# Allegro board alinx_acau15_carrier_21.brd
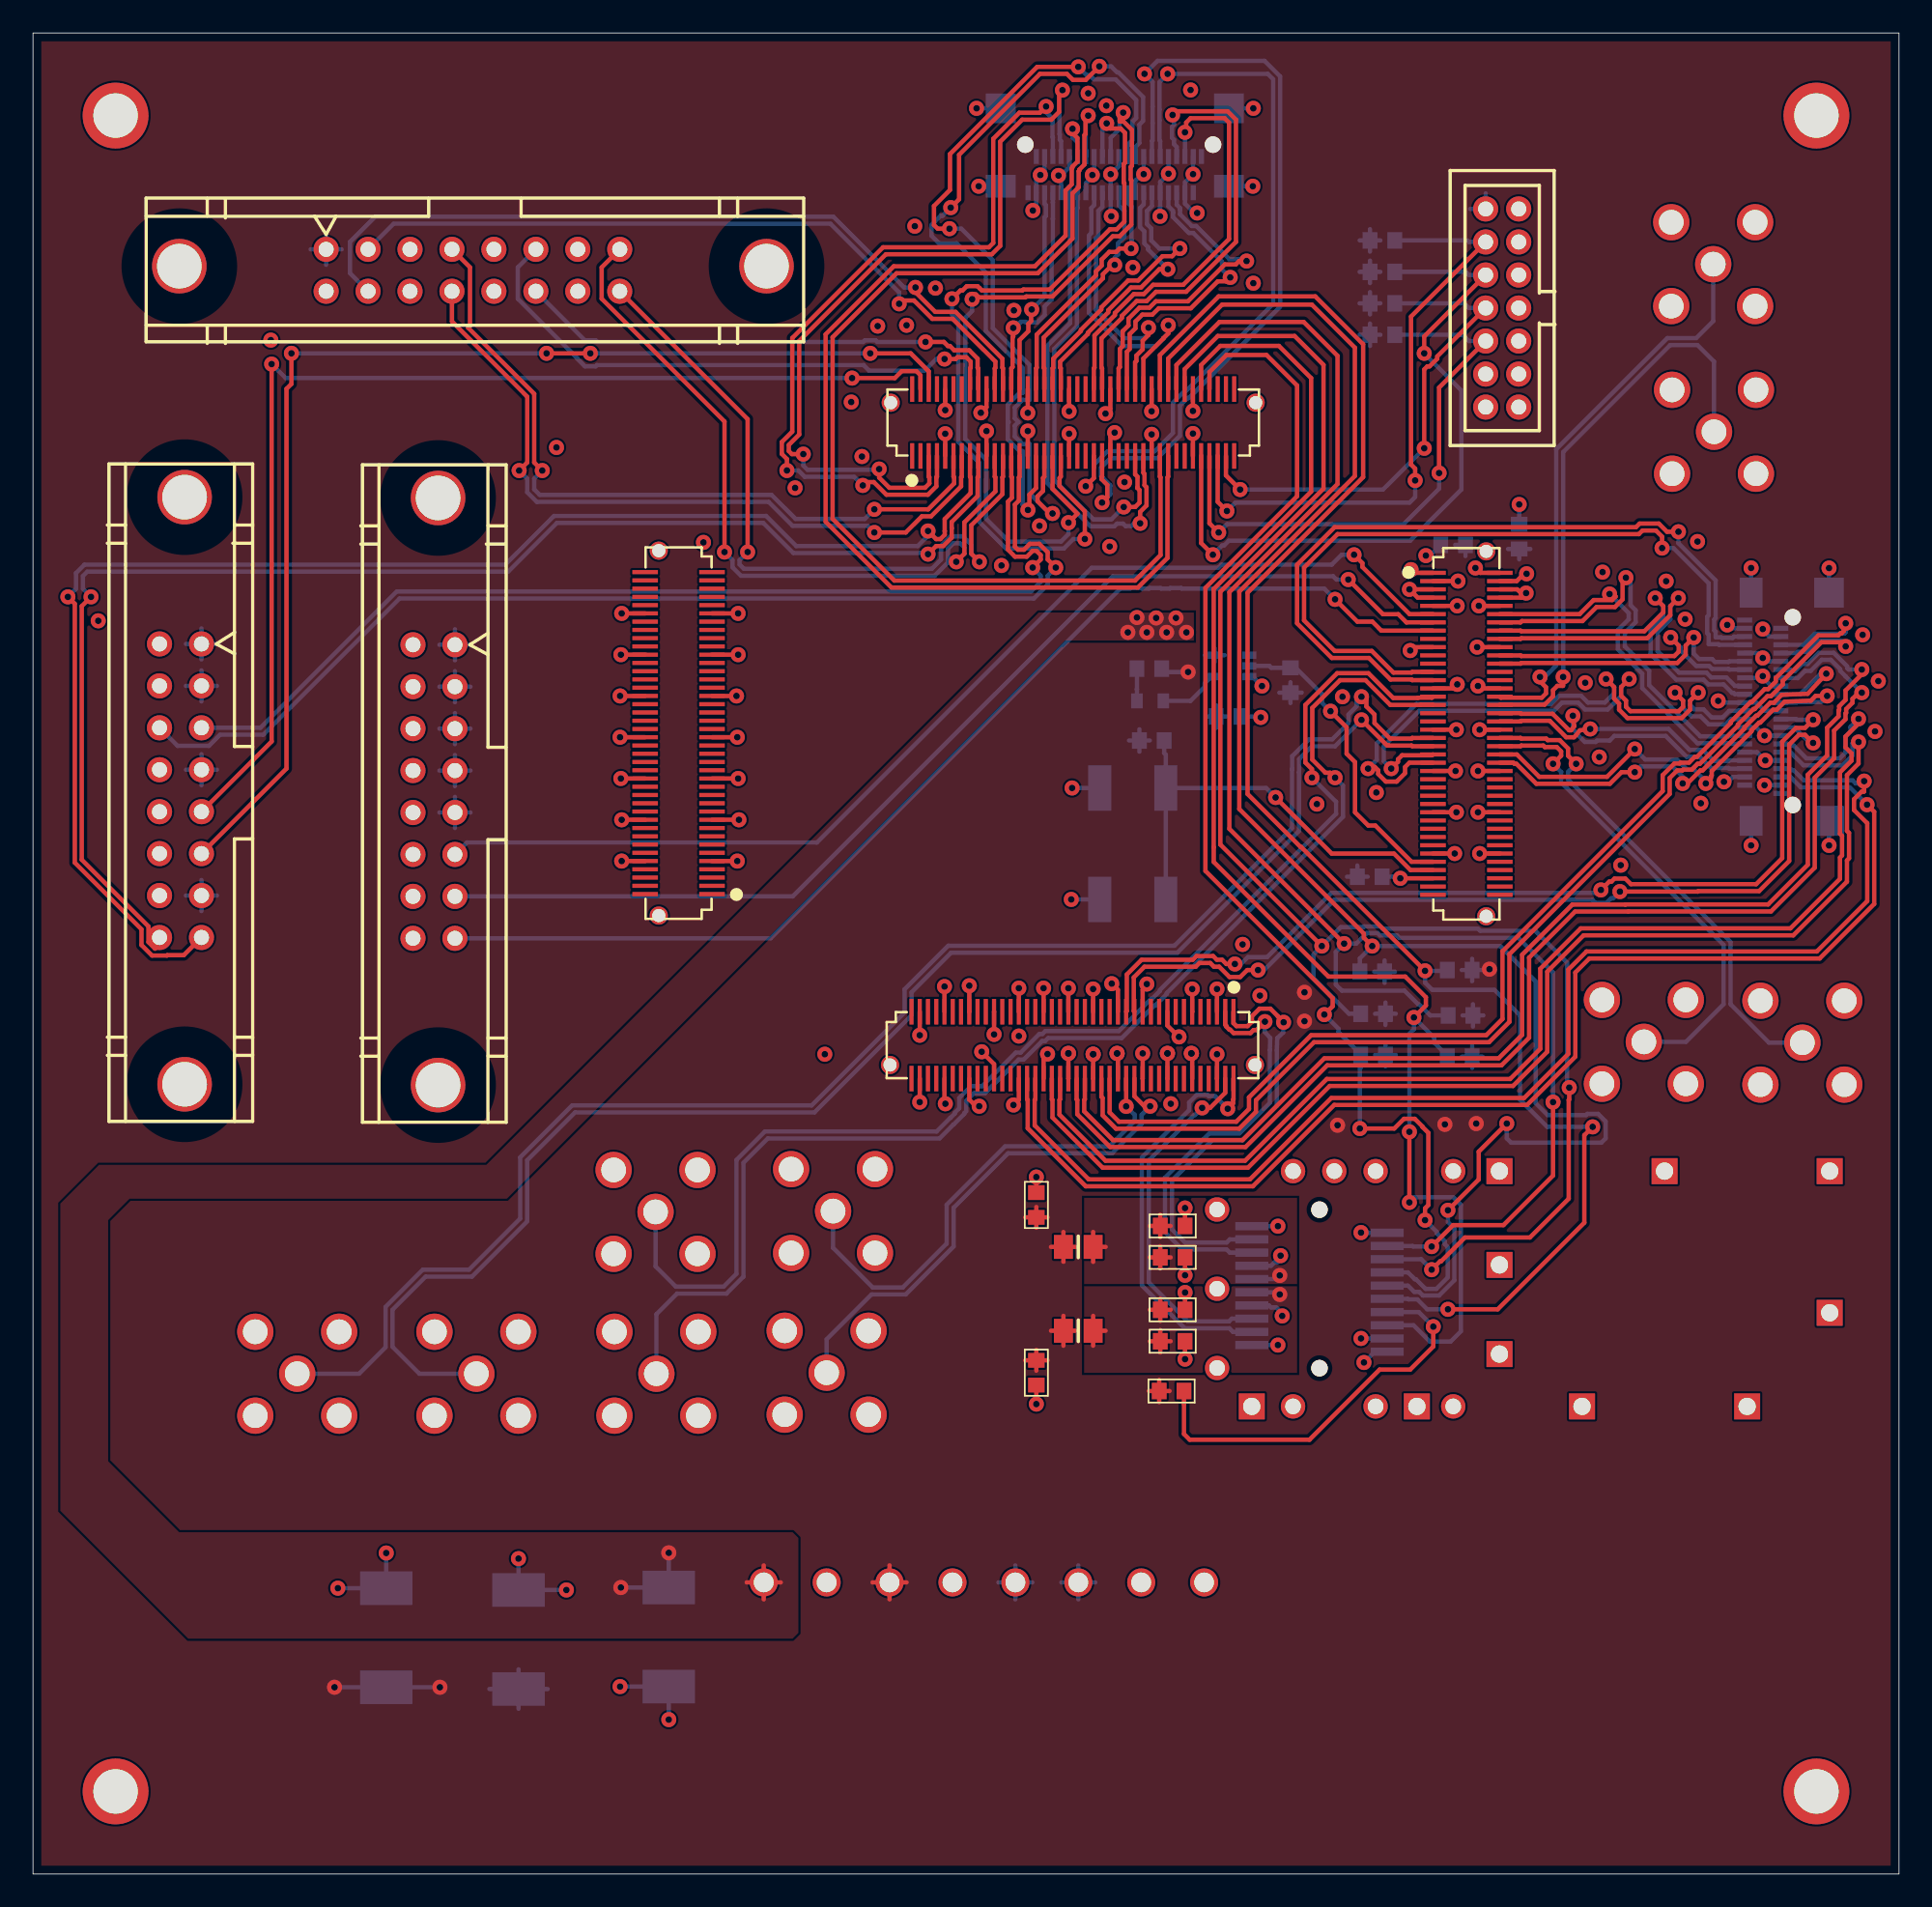
[diagram p0: board, top side]
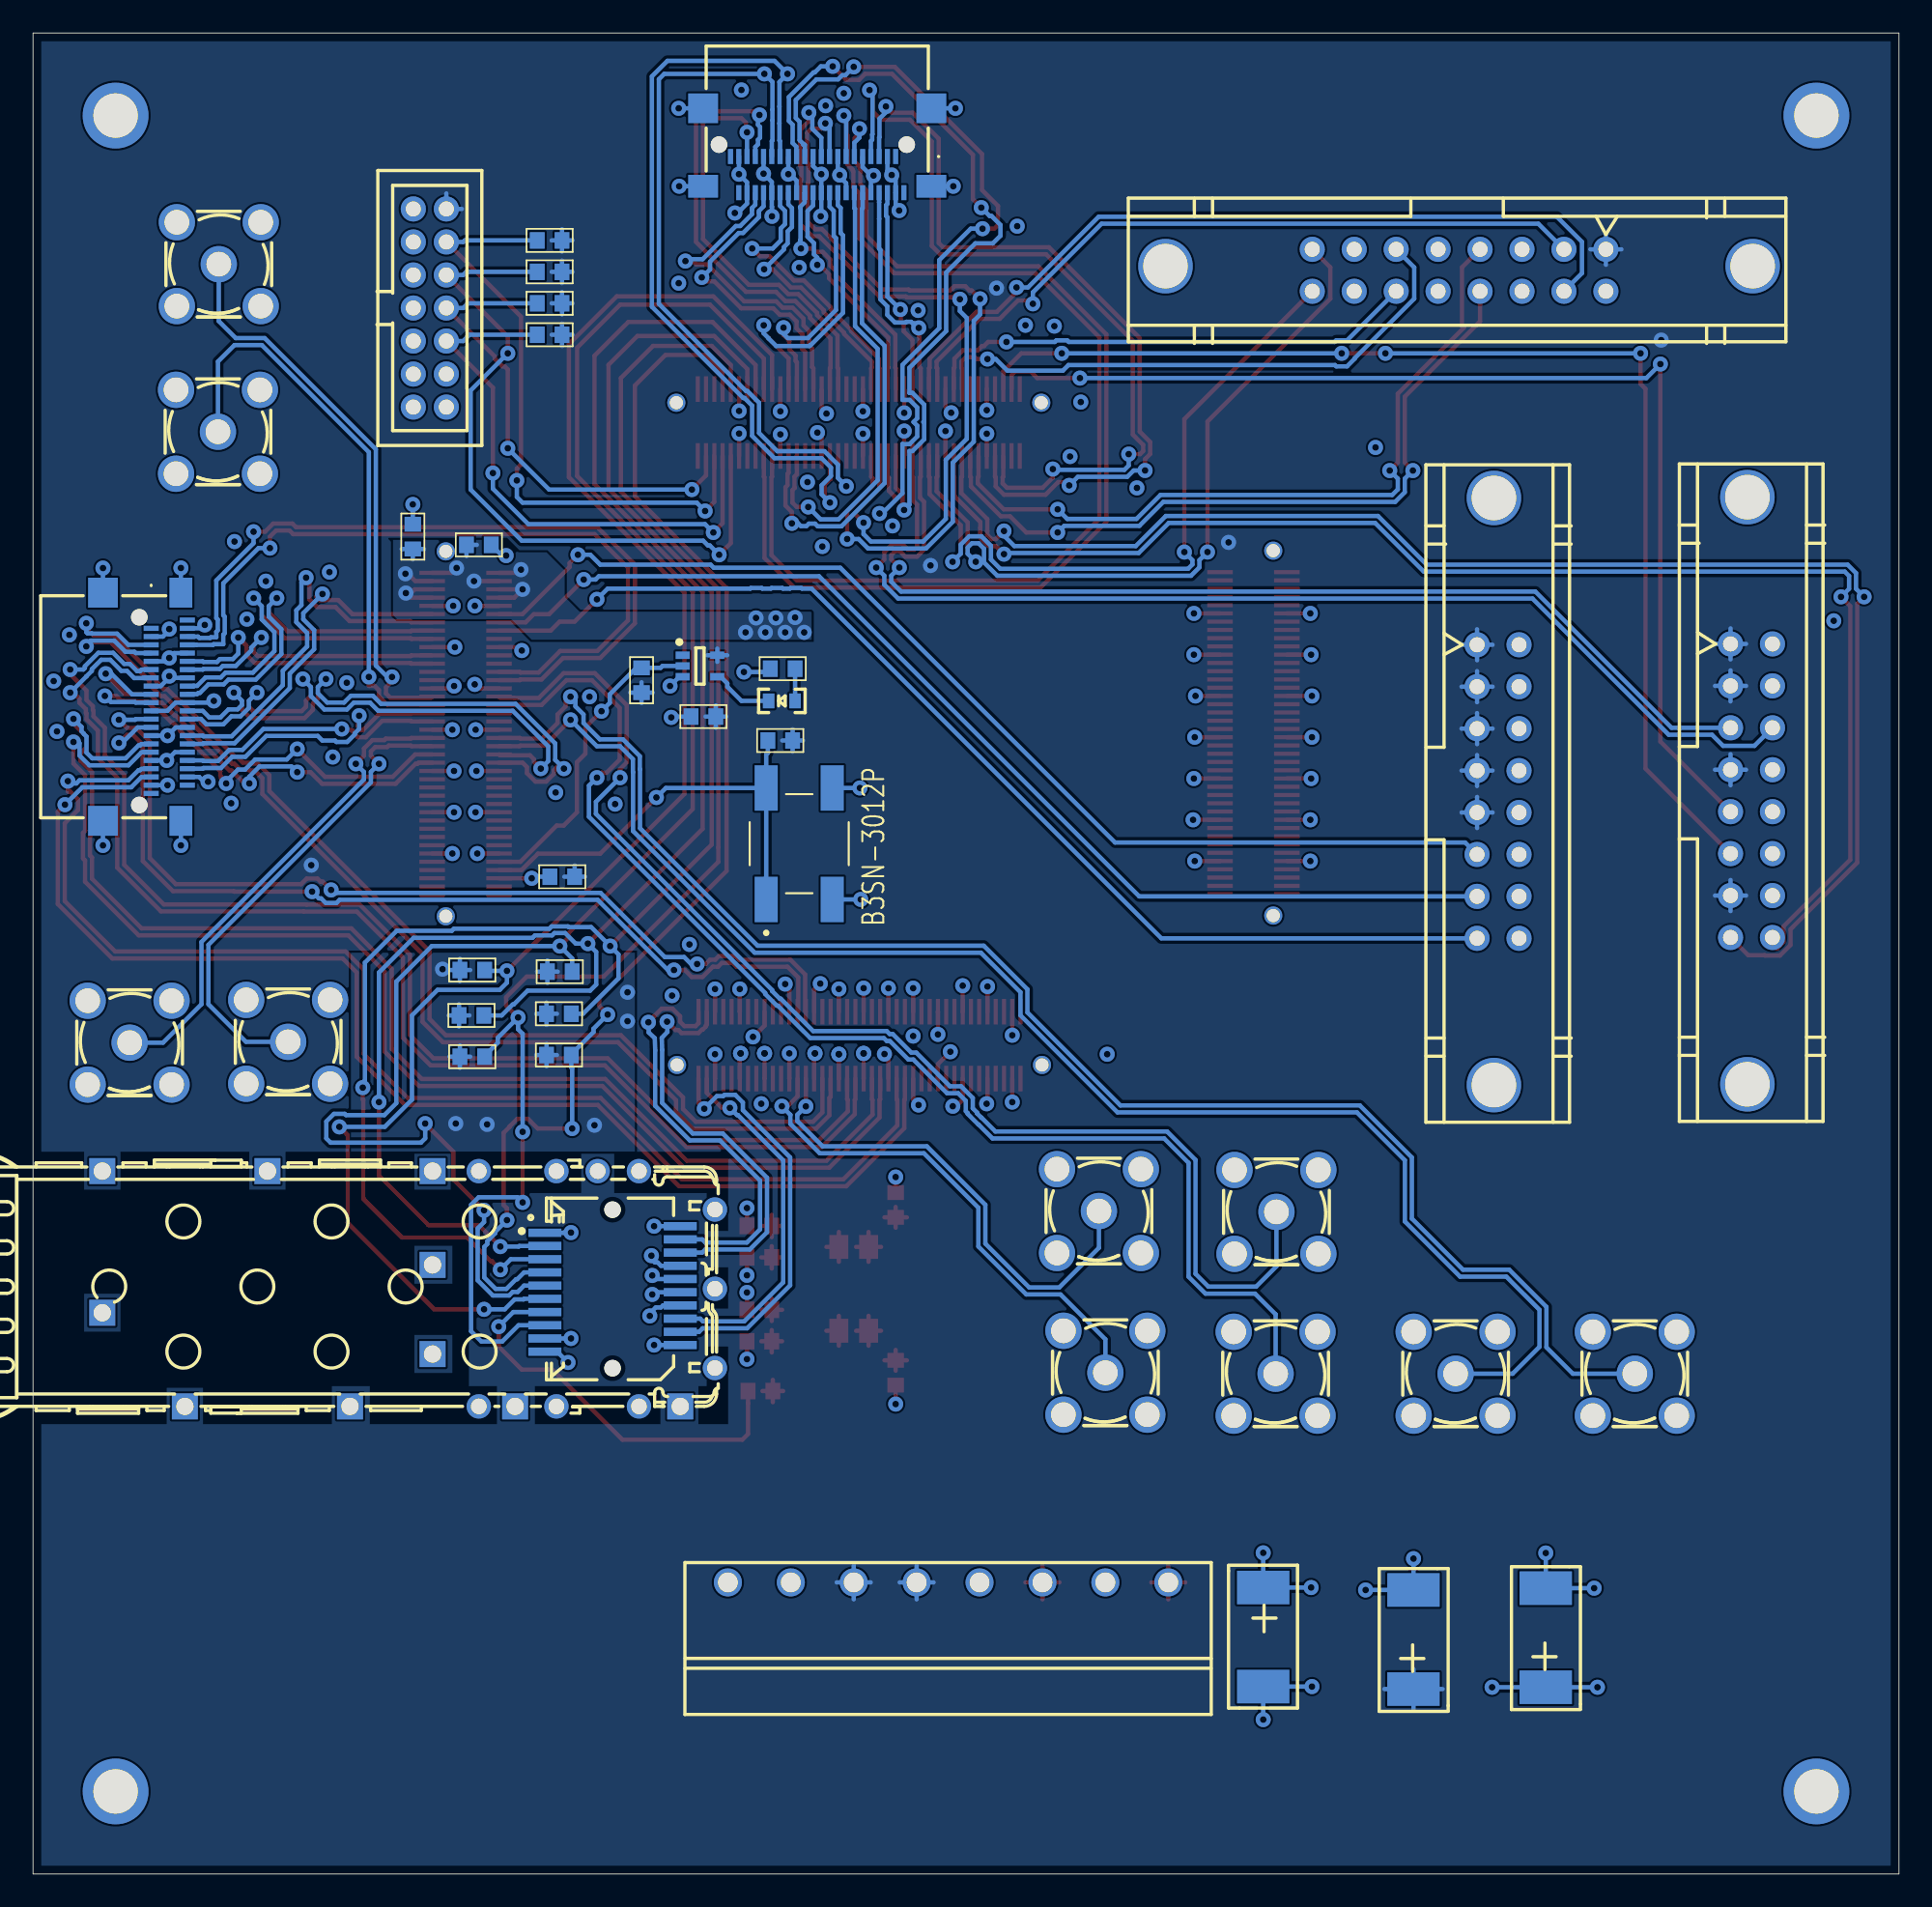
[diagram p1: board, bottom side, seen from below]

Outline 113 x 111.5 mm; copper layers: TOP, L2, L3, BOTTOM. Coordinates in mm from the lower left corner of the outline.
Outline path: 0,111.5 113,111.5 113,0 0,0 0,111.5

## Design rules (mm)
constraint set DEFAULT: min track width 0.262, pair gap 0.16
net group 224_RX<1>: nets 224_RX_N<1> 224_RX_P<1>
net group 224_RX<2>: nets 224_RX_N<2> 224_RX_P<2>
net group 224_RX<3>: nets 224_RX_N<3> 224_RX_P<3>
net group 224_TX<1>: nets 224_TX_N<1> 224_TX_P<1>
net group 224_TX<2>: nets 224_TX_N<2> 224_TX_P<2>
net group 224_TX<3>: nets 224_TX_N<3> 224_TX_P<3>
net group 225_RX<0>: nets 225_RX_N<0> 225_RX_P<0>
net group 225_RX<1>: nets 225_RX_N<1> 225_RX_P<1>
net group 225_RX<2>: nets 225_RX_N<2> 225_RX_P<2>
net group 225_RX<3>: nets 225_RX_N<3> 225_RX_P<3>
net group 225_TX<0>: nets 225_TX_N<0> 225_TX_P<0>
net group 225_TX<1>: nets 225_TX_N<1> 225_TX_P<1>
net group 225_TX<2>: nets 225_TX_N<2> 225_TX_P<2>
net group 225_TX<3>: nets 225_TX_N<3> 225_TX_P<3>
net group 226_CLK0: nets 226_CLK0_N 226_CLK0_P
net group 226_RX<0>: nets 226_RX_N<0> 226_RX_P<0>
net group 226_RX<1>: nets 226_RX_N<1> 226_RX_P<1>
net group 226_RX<2>: nets 226_RX_N<2> 226_RX_P<2>
net group 226_RX<3>: nets 226_RX_N<3> 226_RX_P<3>
net group 226_TX<0>: nets 226_TX_N<0> 226_TX_P<0>
net group 226_TX<1>: nets 226_TX_N<1> 226_TX_P<1>
net group 226_TX<2>: nets 226_TX_N<2> 226_TX_P<2>
net group 226_TX<3>: nets 226_TX_N<3> 226_TX_P<3>
net group ADC_ORC: nets ADC_ORC_N ADC_ORC_P
net group ADC_ORD: nets ADC_ORD_N ADC_ORD_P
net group ADC_REFCLK: nets ADC_REFCLK_N ADC_REFCLK_P
net group ADC_SCLK: nets ADC_SCLK_N ADC_SCLK_P
net group ADC_SCSB: nets ADC_SCSB_N ADC_SCSB_P
net group ADC_SDI: nets ADC_SDI_N ADC_SDI_P
net group ADC_SYSREF: nets ADC_SYSREF_N ADC_SYSREF_P
net group ADC_TRIGOUT: nets ADC_TRIGOUT_N ADC_TRIGOUT_P
net group B64_1V8<3>: nets B64_1V8_N<3> B64_1V8_P<3>
net group B64_1V8<9>: nets B64_1V8_N<9> B64_1V8_P<9>
net group B64_1V8<10>: nets B64_1V8_N<10> B64_1V8_P<10>
net group B64_1V8<15>: nets B64_1V8_N<15> B64_1V8_P<15>
net group B64_1V8<16>: nets B64_1V8_N<16> B64_1V8_P<16>
net group B64_1V8<17>: nets B64_1V8_N<17> B64_1V8_P<17>
net group B64_1V8<18>: nets B64_1V8_N<18> B64_1V8_P<18>
net group B64_1V8<19>: nets B64_1V8_N<19> B64_1V8_P<19>
net group B64_1V8<20>: nets B64_1V8_N<20> B64_1V8_P<20>
net group B64_1V8<21>: nets B64_1V8_N<21> B64_1V8_P<21>
net group B64_1V8<22>: nets B64_1V8_N<22> B64_1V8_P<22>
net group B64_1V8<23>: nets B64_1V8_N<23> B64_1V8_P<23>
net group B64_1V8<24>: nets B64_1V8_N<24> B64_1V8_P<24>
net group B65_1V8<20>: nets B65_1V8_N<20> B65_1V8_P<20>
net group B65_1V8<21>: nets B65_1V8_N<21> B65_1V8_P<21>
net group B65_1V8<22>: nets B65_1V8_N<22> B65_1V8_P<22>
net group B65_1V8<23>: nets B65_1V8_N<23> B65_1V8_P<23>
net group B65_1V8<24>: nets B65_1V8_N<24> B65_1V8_P<24>
net group B84_3V3<4>: nets B84_3V3_N<4> B84_3V3_P<4>
net group B84_3V3<5>: nets B84_3V3_N<5> B84_3V3_P<5>
net group B84_3V3<6>: nets B84_3V3_N<6> B84_3V3_P<6>
net group B84_3V3<7>: nets B84_3V3_N<7> B84_3V3_P<7>
net group B84_3V3<8>: nets B84_3V3_N<8> B84_3V3_P<8>
net group B84_3V3<9>: nets B84_3V3_N<9> B84_3V3_P<9>
net group B84_3V3<10>: nets B84_3V3_N<10> B84_3V3_P<10>
net group B84_3V3<11>: nets B84_3V3_N<11> B84_3V3_P<11>
net group B84_3V3<12>: nets B84_3V3_N<12> B84_3V3_P<12>
net group B85_L<1>: nets B85_L_N<1> B85_L_P<1>
net group B85_L<2>: nets B85_L_N<2> B85_L_P<2>
net group B85_L<3>: nets B85_L_N<3> B85_L_P<3>
net group B85_L<4>: nets B85_L_N<4> B85_L_P<4>
net group B85_L<5>: nets B85_L_N<5> B85_L_P<5>
net group B85_L<6>: nets B85_L_N<6> B85_L_P<6>
net group B85_L<7>: nets B85_L_N<7> B85_L_P<7>
net group B85_L<8>: nets B85_L_N<8> B85_L_P<8>
net group B85_L<9>: nets B85_L_N<9> B85_L_P<9>
net group B85_L<10>: nets B85_L_N<10> B85_L_P<10>
net group B85_L<11>: nets B85_L_N<11> B85_L_P<11>
net group B85_L<12>: nets B85_L_N<12> B85_L_P<12>
net group B86_L<1>: nets B86_L_N<1> B86_L_P<1>
net group B86_L<2>: nets B86_L_N<2> B86_L_P<2>
net group B86_L<3>: nets B86_L_N<3> B86_L_P<3>
net group B86_L<4>: nets B86_L_N<4> B86_L_P<4>
net group B86_L<5>: nets B86_L_N<5> B86_L_P<5>
net group B86_L<6>: nets B86_L_N<6> B86_L_P<6>
net group B86_L<7>: nets B86_L_N<7> B86_L_P<7>
net group B86_L<8>: nets B86_L_N<8> B86_L_P<8>
net group B86_L<9>: nets B86_L_N<9> B86_L_P<9>
net group B86_L<10>: nets B86_L_N<10> B86_L_P<10>
net group B86_L<11>: nets B86_L_N<11> B86_L_P<11>
net group B86_L<12>: nets B86_L_N<12> B86_L_P<12>
net group ETH_REFCLK: nets ETH_REFCLK_N ETH_REFCLK_P
net group ETH_RX: nets ETH_RX_N ETH_RX_P
net group ETH_TX: nets ETH_TX_N ETH_TX_P
net group RST_OUT_FALLING: nets RST_OUT_FALLING_N RST_OUT_FALLING_P
net group RST_OUT_RISING: nets RST_OUT_RISING_N RST_OUT_RISING_P
net group TDC_BX_RST: nets TDC_BX_RST_N TDC_BX_RST_P
net group TDC_REFCLK: nets TDC_REFCLK_N TDC_REFCLK_P
net group TDC_RST: nets TDC_RST_N TDC_RST_P
net group TDC_SYNC: nets TDC_SYNC_N TDC_SYNC_P
net group TDC_TRIG: nets TDC_TRIG_N TDC_TRIG_P
net group TRIG_IN_FALLING: nets TRIG_IN_FALLING_N TRIG_IN_FALLING_P
net group TRIG_IN_RISING: nets TRIG_IN_RISING_N TRIG_IN_RISING_P
net group B64_1V8_TU: nets ADC_CALSTAT ADC_CALTRIG ADC_SDO B64_1V8_TU<3>
net group B65_1V8<18>: nets TDC_D_N<0>
net group B65_1V8_N: nets TDC_EID_RST_N
net group B65_1V8_P: nets TDC_EID_RST_P
net group B65_1V8_TU: nets B65_1V8_TU<2> B65_1V8_TU<3> TDC_SCL TDC_SDA
net group B84_3V3_N: nets ETH_SFP_FLT ETH_SFP_LOS ETH_SFP_PSNT
net group B84_3V3_P: nets ETH_SCL ETH_SDA ETH_SFP_TXDIS
net group GPIO_N: nets GPIO_N<1> GPIO_N<2> GPIO_N<3>
net group GPIO_P: nets GPIO_P<0> GPIO_P<1> GPIO_P<2> GPIO_P<3>
net group TDC_D_N: nets GPIO_N<0> TDC_D_N<1> TDC_D_N<2> TDC_D_N<3> TDC_D_N<4> TDC_D_N<5> TDC_D_N<6> TDC_D_N<7>
net group TDC_D_P: nets TDC_D_P<0> TDC_D_P<1> TDC_D_P<2> TDC_D_P<3> TDC_D_P<4> TDC_D_P<5> TDC_D_P<6> TDC_D_P<7>

## Placement (name value [footprint] x y rotation side)
C1  100nF  [C0603]  60.76 40.52 270 top
C2  1uF  [C0603]  60.76 30.36 90 top
C3  100nF  [C0603]  69.02 32.27 180 top
C4  1uF  [C0603]  69.02 34.17 180 top
C5  100nF  [C0603]  69.02 39.25 180 top
C6  1uF  [C0603]  69.02 37.34 180 top
C7  10uF  [C7343POL]  38.5 17.35 270 bottom
C8  10uF  [C7343POL]  29.4 11.2 90 bottom
C9  100nF  [C0603]  72.4 70.1 180 bottom
C10  10uF  [C7343POL]  21.39 11.31 90 bottom
C11  100nF  [C0603]  86 80.5 0 bottom
C12  100nF  [C0603]  90 81 270 bottom
CON1  -  [AXK680337YG]  86.8 69.06 270 top
CON2  -  [AXK680337YG]  62.99 87.91 0 top
CON3  -  [AXK680337YG]  39.09 69.1 90 top
CON4  -  [AXK680337YG]  62.95 50.2 180 top
IC1  -  [SOT65P210X110-5N]  72.61 73.16 180 bottom
J1  -  [TYCO_1367073]  77.91 35.44 180 bottom
J2  -  [CON14MD_2MM]  89.97 100.84 180 bottom
J3  2227023-1  [22273033]  77.91 35.44 180 bottom
J4  -  [PHOENIX_MC15-8-G-381]  70.92 17.66 90 bottom
J5  -  [G14A421211112HR]  105.84 75.44 270 bottom
J6  -  [G14A421211112HR]  60.76 104.02 0 bottom
J7  -  [CONVROUD2X8]  25.55 74.45 180 bottom
J8  -  [CONVROUD2X8]  10.2 74.5 180 bottom
J9  -  [CONVROUD2X8]  17.75 98.4 270 bottom
L1  330R@100MHz  [INDC2013X105N]  63.3 32.9 0 top
L2  330R@100MHz  [INDC2013X105N]  63.3 37.98 180 top
LD1  Red  [LED_0603]  66.85 71.05 0 bottom
LK1  -  [FXG_M2-7]  108 5 0 top
LK2  -  [FXG_M2-7]  5 5 0 top
LK3  -  [FXG_M2-7]  5 106.5 0 top
LK4  -  [FXG_M2-7]  108 106.5 0 top
NOREF  -  []  5 106.5 90 top
NOREF#2  -  []  108 106.5 90 top
NOREF#3  -  []  5.94 0 90 top
NOREF#4  -  []  0 6.19 0 top
NOREF#5  -  []  0 105.76 0 top
NOREF#6  -  []  107.5 0 90 top
NOREF#7  -  []  108 106.5 0 top
NOREF#8  -  []  108 5 0 top
R1  4.7k  [C0603]  81.72 93.22 180 bottom
R2  4.7k  [C0603]  81.72 95.13 180 bottom
R3  4.7k  [C0603]  81.72 97.03 180 bottom
R4  4.7k  [C0603]  81.72 98.94 180 bottom
R5  4.7k  [C0603]  81.1 54.65 0 bottom
R6  4.7k  [C0603]  81.15 49.6 0 bottom
R7  4.7k  [C0603]  81.15 52.1 0 bottom
R8  4.7k  [C0603]  86.45 52 0 bottom
R9  4.7k  [C0603]  86.4 49.5 0 bottom
R10  4.7k  [C0603]  80.95 60.4 180 bottom
R11  4.7k  [C0603]  67.75 68.65 180 bottom
R12  4.7k  [C0603]  76.15 72.3 270 bottom
R13  4.7k  [C0603]  68.95 29.25 180 top
R14  4.7k  [C0603]  86.4 54.75 0 bottom
R15  220  [C0603]  67.6 73 0 bottom
SMA1  -  [PCOAXSMA_D]  48.45 40.15 180 bottom
SMA2  -  [PCOAXSMA_D]  48.06 30.36 180 bottom
SMA3  -  [PCOAXSMA_D]  97.55 50.4 180 bottom
SMA4  -  [PCOAXSMA_D]  107.15 50.35 180 bottom
SMA5  -  [PCOAXSMA_D]  26.85 30.3 180 bottom
SMA6  -  [PCOAXSMA_D]  16 30.3 180 bottom
SMA7  -  [PCOAXSMA_D]  37.75 30.3 180 bottom
SMA8  -  [PCOAXSMA_D]  37.7 40.1 180 bottom
SMA9  -  [PCOAXSMA_D]  101.8 87.35 180 bottom
SMA10  -  [PCOAXSMA_D]  101.75 97.5 180 bottom
SW1  -  [SW_B3SN-3012P]  66.6 62.4 90 bottom

## Library data of the parts
C1 C3 C5 C9 C11 C12 = CAPCERSMDCL2: part number: CAPCERSMDCL2_0603-100NF,16V; tolerance: 10%
C2 C4 C6 = CAPCERSMDCL2: part number: CAPCERSMDCL2_0603-1UF,16V; tolerance: 10%
C7 C8 C10 = ELCAPTAN: part number: ELCAPTAN_SMD_D-10UF_1R0,25V; tolerance: 10%
CON1 = ACAU15_CON1
CON2 = ACAU15_CON2
CON3 = ACAU15_CON3
CON4 = ACAU15_CON4
IC1 = 74LVC1G07: part number: SN74LVC1G07DCK
J1 = CON20P_SFP: part number: CON20P_SFP-1888247-1; room: SFP0
J2 = CON14P: part number: CON14P-MOLEX_87831
J3 = SFP_CAGE-2227023: part number: SFP_CAGE-2227023-2227023-1,SFP_CAGE-2227023-1
J4 = CON8P: part number: CON8P-MC158G381
J5 J6 = G14A421211112HR
J7-J9 = CON16P: part number: CON16P-VROUD2X8
L1 L2 = FERRITE: part number: FERRITE_SMD-MPZ1608S331A,TDK
LD1 = LED: part number: LED-598-8010107F
LK1-LK4 = 1-HOLE: part number: 1-HOLE_FXG2-7-BASE
R1-R14 = RSMD0603: part number: RSMD0603_1/10W-4.7K,1%; tolerance: 1%
R15 = RSMD0603: part number: RSMD0603_1/10W-220,1%; tolerance: 1%
SMA1-SMA10 = COAX: part number: COAX-82SMA-50-0-101
SW1 = B3SN-3012P

## Footprints (pads in the part's own frame, mm; a bottom-side part is the same pattern mirrored in y, then rotated)
22273033
  round 1.478 hole 0.95: 1(6.2,-4.795) 2(6.2,0.005) 3(6.2,4.805) 4(1.6,7.13) 5(-0.9,7.13) 6(-3.4,7.13) 7(-8.1,7.13) 14(-8.1,-7.12) 16(-3.4,-7.12) 17(1.6,-7.12)
  rect 1.575x1.575 hole 1.05: 8(-10.9,7.13) 9(-20.9,7.13) 10(-30.9,7.13) 11(-30.9,-1.45) 12(-25.9,-7.12) 13(-15.9,-7.12) 15(-5.9,-7.12) 18(4.1,-7.12) 19(-10.9,-3.95) 20(-10.9,1.45)
AXK680337YG
  rect 0.25x1.55 smd: 1(-9.75,-2.025) 2(-9.75,2.025) 3(-9.25,-2.025) 4(-9.25,2.025) 5(-8.75,-2.025) 6(-8.75,2.025) 7(-8.25,-2.025) 8(-8.25,2.025) 9(-7.75,-2.025) 10(-7.75,2.025) 11(-7.25,-2.025) 12(-7.25,2.025) 13(-6.75,-2.025) 14(-6.75,2.025) 15(-6.25,-2.025) 16(-6.25,2.025) 17(-5.75,-2.025) 18(-5.75,2.025) 19(-5.25,-2.025) 20(-5.25,2.025) 21(-4.75,-2.025) 22(-4.75,2.025) 23(-4.25,-2.025) 24(-4.25,2.025) 25(-3.75,-2.025) 26(-3.75,2.025) 27(-3.25,-2.025) 28(-3.25,2.025) 29(-2.75,-2.025) 30(-2.75,2.025) 31(-2.25,-2.025) 32(-2.25,2.025) 33(-1.75,-2.025) 34(-1.75,2.025) 35(-1.25,-2.025) 36(-1.25,2.025) 37(-0.75,-2.025) 38(-0.75,2.025) 39(-0.25,-2.025) 40(-0.25,2.025) 41(0.25,-2.025) 42(0.25,2.025) 43(0.75,-2.025) 44(0.75,2.025) 45(1.25,-2.025) 46(1.25,2.025) 47(1.75,-2.025) 48(1.75,2.025) 49(2.25,-2.025) 50(2.25,2.025) 51(2.75,-2.025) 52(2.75,2.025) 53(3.25,-2.025) 54(3.25,2.025) 55(3.75,-2.025) 56(3.75,2.025) 57(4.25,-2.025) 58(4.25,2.025) 59(4.75,-2.025) 60(4.75,2.025) 61(5.25,-2.025) 62(5.25,2.025) 63(5.75,-2.025) 64(5.75,2.025) 65(6.25,-2.025) 66(6.25,2.025) 67(6.75,-2.025) 68(6.75,2.025) 69(7.25,-2.025) 70(7.25,2.025) 71(7.75,-2.025) 72(7.75,2.025) 73(8.25,-2.025) 74(8.25,2.025) 75(8.75,-2.025) 76(8.75,2.025) 77(9.25,-2.025) 78(9.25,2.025) 79(9.75,-2.025) 80(9.75,2.025)
  round 1.1 hole 0.8: 81(-11.05,1.2) 82(11.05,1.2)
C0603
  rect 0.9x1 smd: 1(-0.75,0) 2(0.75,0)
C7343POL
  rect 2.032x3.175 smd: 1(0,0) 2(6,0)
CON14MD_2MM
  round 1.524 hole 0.914: 1(0,0) 2(2,0) 3(0,-2) 4(2,-2) 5(0,-4) 6(2,-4) 7(0,-6) 8(2,-6) 9(0,-8) 10(2,-8) 11(0,-10) 12(2,-10) 13(0,-12) 14(2,-12)
CONVROUD2X8
  round 1.524 hole 0.914: 1(0,0) 2(2.54,0) 3(0,-2.54) 4(2.54,-2.54) 5(0,-5.08) 6(2.54,-5.08) 7(0,-7.62) 8(2.54,-7.62) 9(0,-10.16) 10(2.54,-10.16) 11(0,-12.7) 12(2.54,-12.7) 13(0,-15.24) 14(2.54,-15.24) 15(0,-17.78) 16(2.54,-17.78)
  round 3.302 hole 2.7: 17(1.02,8.89) 18(1.02,-26.67)
FXG_M2-7
  round 3.988 hole 2.692: 1(0,0)
G14A421211112HR
  round 1 hole 1 unplated: (-0.67,-0.72) (10.7,-0.72)
  rect 0.31x0.91 smd: A1(0,0) A2(0.5,0) A3(1,0) A4(1.5,0) A5(2,0) A6(2.5,0) A7(3,0) A8(3.5,0) A9(4,0) A10(4.5,0) A11(5,0) A12(5.5,0) A13(6,0) A14(6.5,0) A15(7,0) A16(7.5,0) A17(8,0) A18(8.5,0) A19(9,0) A20(9.5,0) A21(10,0) B1(-0.5,2.19) B2(0,2.19) B3(0.5,2.19) B4(1,2.19) B5(1.5,2.19) B6(2,2.19) B7(2.5,2.19) B8(3,2.19) B9(3.5,2.19) B10(4,2.19) B11(4.5,2.19) B12(5,2.19) B13(5.5,2.19) B14(6,2.19) B15(6.5,2.19) B16(7,2.19) B17(7.5,2.19) B18(8,2.19) B19(8.5,2.19) B20(9,2.19) B21(9.5,2.19)
  rect 1.81x1.8 smd: MP1(-2.16,-2.92) MP2(11.66,-2.92)
  rect 1.81x1.38 smd: MP3(-2.16,1.8) MP4(11.66,1.8)
INDC2013X105N
  rect 1.15x1.45 smd: 1(-0.9,0) 2(0.9,0)
LED_0603
  rect 0.7x0.9 smd: 1(0,0) 2(1.6,0)
PCOAXSMA_D
  round 2.2 hole 1.5: 1(0,0) 2(2.54,-2.54) 3(2.54,2.54) 4(-2.54,2.54) 5(-2.54,-2.54)
PHOENIX_MC15-8-G-381
  round 1.7 hole 1.2: 1(0,0) 2(0,-3.81) 3(0,-7.62) 4(0,-11.43) 5(0,-15.24) 6(0,-19.05) 7(0,-22.86) 8(0,-26.67)
SOT65P210X110-5N
  rect 0.85x0.45 smd: 1(-1.05,0.65) 2(-1.05,0) 3(-1.05,-0.65) 4(1.05,-0.65) 5(1.05,0.65)
SW_B3SN-3012P
  rect 2.75x1.4 smd: 1(-3.375,2) 2(3.375,2) 3(-3.375,-2) 4(3.375,-2)
TYCO_1367073
  round 1 hole 1.55 unplated: (0,-4.805) (0,4.795)
  rect 2x0.5 smd: 1(-4.1,3.395) 2(-4.1,2.595) 3(-4.1,1.795) 4(-4.1,0.995) 5(-4.1,0.195) 6(-4.1,-0.605) 7(-4.1,-1.405) 8(-4.1,-2.205) 9(-4.1,-3.005) 10(-4.1,-3.805) 11(4.1,-3.405) 12(4.1,-2.605) 13(4.1,-1.805) 14(4.1,-1.005) 15(4.1,-0.205) 16(4.1,0.595) 17(4.1,1.395) 18(4.1,2.195) 19(4.1,2.995) 20(4.1,3.795)

## Nets
GND_SIGNAL: C1.1 C2.1 C3.1 C4.1 C5.1 C6.1 C7.2(B<0>) C8.2(B<0>) C9.1 C10.2(B<0>) C11.1 C12.1 CON1.9 CON1.10 CON1.19 CON1.20 CON1.29 CON1.30 CON1.39 CON1.40 CON1.49 CON1.50 CON1.59 CON1.60 CON1.69 CON1.70 CON2.9 CON2.10 CON2.19 CON2.20 CON2.29 CON2.30 CON2.39 CON2.40 CON2.49 CON2.50 CON2.59 CON2.60 CON2.69 CON2.70 CON3.9 CON3.10 CON3.19 CON3.20 CON3.29 CON3.30 CON3.39 CON3.40 CON3.49 CON3.50 CON3.59 CON3.60 CON3.69 CON3.70 CON4.5 CON4.6 CON4.11 CON4.12 CON4.17 CON4.18 CON4.23 CON4.24 CON4.29 CON4.30 CON4.35 CON4.36 CON4.41 CON4.42 CON4.47 CON4.48 CON4.53 CON4.54 CON4.59 CON4.60 CON4.65 CON4.66 CON4.71 CON4.72 CON4.77 CON4.78 IC1.3 J1.1 J1.9 J1.10 J1.11 J1.14 J1.17 J1.20(VEET3) J2.1 J2.3 J2.5 J2.7 J2.9 J2.11 J2.13 J3.1 J3.2 J3.3 J3.4 J3.5 J3.6 J3.7 J3.8 J3.9 J3.10 J3.11 J3.12 J3.13 J3.14 J3.15 J3.16 J3.17 J3.18 J3.19(CG_9) J3.20 J4.1 J4.2 J4.5 J4.7 J5.A2 J5.A5 J5.A8 J5.A11 J5.A14 J5.A17 J5.A20 J5.B2 J5.B5 J5.B8 J5.B11 J5.B14 J5.B17 J5.B20 J5.MP1 J5.MP2 J5.MP3 J5.MP4 J6.A2 J6.A5 J6.A8 J6.A11 J6.A14 J6.A17 J6.A20 J6.B2 J6.B5 J6.B8 J6.B11 J6.B14 J6.B17 J6.B20 J6.MP1 J6.MP2 J6.MP3 J6.MP4 J7.2 J7.4 J7.6 J7.8 J7.10(A<9>) J7.12 J7.14 J7.16 J8.2 J8.4 J8.8 J8.10(A<9>) J8.12 J8.14 J9.2 J9.5 J9.6 J9.9 J9.10(A<9>) J9.13 J9.14 LK1.1(A<0>) LK2.1(A<0>) LK3.1(A<0>) LK4.1(A<0>) SMA1.2 SMA1.3 SMA1.4 SMA1.5(B<3>) SMA2.2 SMA2.3 SMA2.4 SMA2.5(B<3>) SMA3.2 SMA3.3 SMA3.4 SMA3.5(B<3>) SMA4.2 SMA4.3 SMA4.4 SMA4.5(B<3>) SMA5.2 SMA5.3 SMA5.4 SMA5.5(B<3>) SMA6.2 SMA6.3 SMA6.4 SMA6.5(B<3>) SMA7.2 SMA7.3 SMA7.4 SMA7.5(B<3>) SMA8.2 SMA8.3 SMA8.4 SMA8.5(B<3>) SMA9.2 SMA9.3 SMA9.4 SMA9.5(B<3>) SMA10.2 SMA10.3 SMA10.4 SMA10.5(B<3>) SW1.3 SW1.4(NO__1)
P1V8: C8.1 C9.2(B<0>) IC1.5 J2.2 J4.3 J4.4 J7.1 J7.3 J7.5 J7.7 J7.9 J8.1 J8.3 J8.7 J8.13 J9.1 R1.2(B<0>) R2.2(B<0>) R3.2(B<0>) R4.2(B<0>) R10.2(B<0>) R11.2(B<0>) R12.2(B<0>)
P3V3: C1.2(B<0>) C2.2(B<0>) C10.1 J4.6 L1.1 L2.2(B<0>) R5.2(B<0>) R6.2(B<0>) R7.2(B<0>) R8.2(B<0>) R9.2(B<0>) R13.2(B<0>) R14.2(B<0>) R15.2(B<0>)
P12V: C7.1 C11.2(B<0>) C12.2(B<0>) CON1.1 CON1.2 CON1.3 CON1.4 CON1.5 CON1.6 CON1.7 CON1.8 J4.8(A<7>)
VCCR_3V3: C3.2(B<0>) C4.2(B<0>) J1.15 L1.2(B<0>)
VCCT_3V3: C5.2(B<0>) C6.2(B<0>) J1.16 L2.1
224_RX_N<1>: CON4.8
224_RX_N<2>: CON4.14
224_RX_N<3>: CON4.20
224_RX_P<1>: CON4.10
224_RX_P<2>: CON4.16
224_RX_P<3>: CON4.22
224_TX_N<1>: CON4.7
224_TX_N<2>: CON4.13
224_TX_N<3>: CON4.19
224_TX_P<1>: CON4.9
224_TX_P<2>: CON4.15
224_TX_P<3>: CON4.21
225_RX_N<0>: CON4.32 J5.A3
225_RX_N<1>: CON4.38 J5.A6
225_RX_N<2>: CON4.44 J5.A15
225_RX_N<3>: CON4.50 J5.A18
225_RX_P<0>: CON4.34 J5.A4
225_RX_P<1>: CON4.40 J5.A7
225_RX_P<2>: CON4.46 J5.A16
225_RX_P<3>: CON4.52 J5.A19
225_TX_N<0>: CON4.31
225_TX_N<1>: CON4.37
225_TX_N<2>: CON4.43
225_TX_N<3>: CON4.49
225_TX_P<0>: CON4.33
225_TX_P<1>: CON4.39
225_TX_P<2>: CON4.45
225_TX_P<3>: CON4.51
226_CLK0_N: CON4.80
226_CLK0_P: CON4.79
226_RX_N<0>: CON4.56
226_RX_N<1>: CON4.62
226_RX_N<2>: CON4.68
226_RX_N<3>: CON4.74
226_RX_P<0>: CON4.58
226_RX_P<1>: CON4.64
226_RX_P<2>: CON4.70
226_RX_P<3>: CON4.76
226_TX_N<0>: CON4.55
226_TX_N<1>: CON4.61
226_TX_N<2>: CON4.67
226_TX_N<3>: CON4.73
226_TX_P<0>: CON4.57
226_TX_P<1>: CON4.63
226_TX_P<2>: CON4.69
226_TX_P<3>: CON4.75(226_TX3_P)
ADC_CALSTAT: CON1.15 J7.15
ADC_CALTRIG: CON1.13 J7.13
ADC_ORC_N: CON1.46 J5.A10
ADC_ORC_P: CON1.48 J5.A9
ADC_ORD_N: CON1.45 J5.B13
ADC_ORD_P: CON1.47 J5.B12
ADC_REFCLK_N: CON4.25 J5.A13
ADC_REFCLK_P: CON4.27 J5.A12
ADC_SCLK_N: CON1.16 J5.B10
ADC_SCLK_P: CON1.18 J5.B9
ADC_SCSB_N: CON1.36 J5.B19
ADC_SCSB_P: CON1.38 J5.B18
ADC_SDI_N: CON1.12 J5.B16
ADC_SDI_P: CON1.14 J5.B15
ADC_SDO: CON1.11 J7.11
ADC_SYSREF_N: CON1.25 J5.B4
ADC_SYSREF_P: CON1.27 J5.B3
ADC_TRIGOUT_N: CON1.22 J5.B7
ADC_TRIGOUT_P: CON1.24 J5.B6
B64_1V8_N<3>: CON1.26
B64_1V8_N<9>: CON1.35
B64_1V8_N<10>: CON1.21
B64_1V8_N<15>: CON1.62
B64_1V8_N<16>: CON1.72
B64_1V8_N<17>: CON1.66
B64_1V8_N<18>: CON1.65
B64_1V8_N<19>: CON1.51
B64_1V8_N<20>: CON1.55
B64_1V8_N<21>: CON1.52
B64_1V8_N<22>: CON1.76
B64_1V8_N<23>: CON1.61
B64_1V8_N<24>: CON1.56
B64_1V8_P<3>: CON1.28
B64_1V8_P<9>: CON1.37
B64_1V8_P<10>: CON1.23
B64_1V8_P<15>: CON1.64
B64_1V8_P<16>: CON1.74
B64_1V8_P<17>: CON1.68
B64_1V8_P<18>: CON1.67
B64_1V8_P<19>: CON1.53
B64_1V8_P<20>: CON1.57
B64_1V8_P<21>: CON1.54
B64_1V8_P<22>: CON1.78
B64_1V8_P<23>: CON1.63
B64_1V8_P<24>: CON1.58
B64_1V8_TU<3>: CON1.17
B65_1V8_N<20>: CON2.51
B65_1V8_N<21>: CON2.42
B65_1V8_N<22>: CON2.1
B65_1V8_N<23>: CON2.41
B65_1V8_N<24>: CON2.12
B65_1V8_P<20>: CON2.53
B65_1V8_P<21>: CON2.44
B65_1V8_P<22>: CON2.3
B65_1V8_P<23>: CON2.43
B65_1V8_P<24>: CON2.14
B65_1V8_TU<2>: CON2.2
B65_1V8_TU<3>: CON2.8
B84_3V3_N<4>: CON2.76
B84_3V3_N<5>: CON3.2
B84_3V3_N<6>: CON2.65
B84_3V3_N<7>: CON3.11
B84_3V3_N<8>: CON3.1
B84_3V3_N<9>: CON3.12
B84_3V3_N<10>: CON3.15
B84_3V3_N<11>: CON3.6
B84_3V3_N<12>: CON3.5
B84_3V3_P<4>: CON2.78
B84_3V3_P<5>: CON3.4
B84_3V3_P<6>: CON2.67
B84_3V3_P<7>: CON3.13
B84_3V3_P<8>: CON3.3
B84_3V3_P<9>: CON3.14
B84_3V3_P<10>: CON3.17
B84_3V3_P<11>: CON3.8
B84_3V3_P<12>: CON3.7
B85_L_N<1>: CON3.21
B85_L_N<2>: CON3.25
B85_L_N<3>: CON3.22
B85_L_N<4>: CON3.31
B85_L_N<5>: CON3.32
B85_L_N<6>: CON3.26
B85_L_N<7>: CON3.45
B85_L_N<8>: CON3.41
B85_L_N<9>: CON3.36
B85_L_N<10>: CON3.42
B85_L_N<11>: CON3.35
B85_L_N<12>: CON3.46
B85_L_P<1>: CON3.23
B85_L_P<2>: CON3.27
B85_L_P<3>: CON3.24
B85_L_P<4>: CON3.33
B85_L_P<5>: CON3.34
B85_L_P<6>: CON3.28
B85_L_P<7>: CON3.47
B85_L_P<8>: CON3.43
B85_L_P<9>: CON3.38
B85_L_P<10>: CON3.44
B85_L_P<11>: CON3.37
B85_L_P<12>: CON3.48
B86_L_N<1>: CON3.52
B86_L_N<2>: CON3.51
B86_L_N<3>: CON3.62
B86_L_N<4>: CON3.55
B86_L_N<5>: CON3.56
B86_L_N<6>: CON3.75
B86_L_N<7>: CON3.66
B86_L_N<8>: CON3.65
B86_L_N<9>: CON3.61
B86_L_N<10>: CON3.72
B86_L_N<11>: CON3.71
B86_L_N<12>: CON3.76
B86_L_P<1>: CON3.54
B86_L_P<2>: CON3.53
B86_L_P<3>: CON3.64
B86_L_P<4>: CON3.57
B86_L_P<5>: CON3.58
B86_L_P<6>: CON3.77
B86_L_P<7>: CON3.68
B86_L_P<8>: CON3.67
B86_L_P<9>: CON3.63(B86_L9_P)
B86_L_P<10>: CON3.74
B86_L_P<11>: CON3.73
B86_L_P<12>: CON3.78
ETH_REFCLK_N: CON4.26 SMA2.1
ETH_REFCLK_P: CON4.28 SMA1.1
ETH_RX_N: CON4.2 J1.12
ETH_RX_P: CON4.4 J1.13
ETH_SCL: CON2.64 J1.5 R5.1
ETH_SDA: CON2.74 J1.4 R6.1
ETH_SFP_FLT: CON2.66 J1.2 R8.1
ETH_SFP_LOS: CON2.72 J1.8 R9.1
ETH_SFP_PSNT: CON2.62 J1.6 R14.1
ETH_SFP_TXDIS: CON2.68 J1.3 R7.1
ETH_TX_N: CON4.1 J1.19
ETH_TX_P: CON4.3 J1.18
GPIO_N<0>: CON2.22 J9.3
GPIO_N<1>: CON2.11 J9.7
GPIO_N<2>: CON2.16 J9.11
GPIO_N<3>: CON2.21 J9.15
GPIO_P<0>: CON2.24 J9.4
GPIO_P<1>: CON2.13 J9.8
GPIO_P<2>: CON2.18 J9.12
GPIO_P<3>: CON2.23 J9.16
RATE_SELECT: J1.7 R13.1
RST_OUT_FALLING_N: CON1.32 SMA10.1
RST_OUT_FALLING_P: CON1.34 SMA9.1
RST_OUT_RISING_N: CON1.31 SMA8.1
RST_OUT_RISING_P: CON1.33 SMA7.1
TCK: CON2.71 J2.6 R3.1
TDC_BX_RST_N: CON2.35 J6.A10
TDC_BX_RST_P: CON2.37 J6.A9
TDC_D_N<0>: CON2.5 J6.A4
TDC_D_N<1>: CON2.61 J6.A7
TDC_D_N<2>: CON2.45 J6.A16
TDC_D_N<3>: CON2.46 J6.A19
TDC_D_N<4>: CON2.26 J6.B4
TDC_D_N<5>: CON2.55 J6.B7
TDC_D_N<6>: CON2.36 J6.B16
TDC_D_N<7>: CON2.52 J6.B19
TDC_D_P<0>: CON2.7 J6.A3
TDC_D_P<1>: CON2.63 J6.A6
TDC_D_P<2>: CON2.47 J6.A15
TDC_D_P<3>: CON2.48 J6.A18
TDC_D_P<4>: CON2.28 J6.B3
TDC_D_P<5>: CON2.57 J6.B6
TDC_D_P<6>: CON2.38 J6.B15
TDC_D_P<7>: CON2.54 J6.B18
TDC_EID_RST_N: CON2.15 J8.15
TDC_EID_RST_P: CON2.17 J8.16
TDC_REFCLK_N: CON2.31 J6.A13
TDC_REFCLK_P: CON2.33 J6.A12
TDC_RST_N: CON2.25 J8.5
TDC_RST_P: CON2.27 J8.6
TDC_SCL: CON2.6 J8.11
TDC_SDA: CON2.4 J8.9
TDC_SYNC_N: CON2.32 J6.B13
TDC_SYNC_P: CON2.34 J6.B12
TDC_TRIG_N: CON2.56 J6.B10
TDC_TRIG_P: CON2.58 J6.B9
TDI: CON2.73 J2.10(A<9>) R1.1
TDO: CON2.77 J2.8 R2.1
TMS: CON2.75(FPGA_TMS) J2.4 R4.1
TRIG_IN_FALLING_N: CON1.41 SMA6.1
TRIG_IN_FALLING_P: CON1.43 SMA5.1
TRIG_IN_RISING_N: CON1.42 SMA4.1
TRIG_IN_RISING_P: CON1.44 SMA3.1
UNNAMED_1_74LVC1G07_I11_A: CON1.71 IC1.2 R12.1
UNNAMED_1_74LVC1G07_I11_Y: IC1.4(Y) LD1.2(K)
UNNAMED_1_ACAU15CONNECTORS_I1_I: CON1.75 R10.1
UNNAMED_1_ACAU15CONNECTORS_I1_P: CON1.73(PROGRAM_B) R11.1 SW1.1 SW1.2
UNNAMED_1_LED_I19_A: LD1.1 R15.1

Pads without a net: CON1 77 79 80 81 82; CON2 79 80 81 82; CON3 16 18 79 80 81 82; CON4 81 82; IC1 1; J2 12 14; J5 A1 A21 B1 B21; J6 A1 A21 B1 B21; J7 17 18; J8 17 18; J9 17 18

## Via types
v1: diameter 0.914, hole 0.406, TOP to BOTTOM, 337 vias

## Routing (per net, layer and track width the routed paths; a pad name or vN(x,y) marks a point on that pad's centre or on a via; arc(x,y) is an arc through that point)
GND_SIGNAL: length 628.7
  TOP w0.262: CON4.6 71.7,48.18 v1(71.7,49.65) ; v1(59.38,46.58) 59.7,46.9 CON4.54 ; CON2.19 v1(57.74,87.39) ; v1(83.4,74.1) 83.6,74.31 CON1.19 ; CON2.29 v1(60.24,87.39) ; v1(67.45,53.9) 67.45,53.8 67.2,53.55 CON4.23 ; CON4.48 61.2,49.42 v1(61.44,49.66) ; v1(62.7,53.65) 62.7,53.26 62.7,53.26 CON4.41 ; v1(70.15,49.7) 70.2,49.65 CON4.12 ; CON4.24 67.2,48.18 v1(67.2,49.7) ; C6.1 v1(69.77,36.26) ; v1(59.7,53.65) CON4.53 ; v1(65.65,49.7) 65.7,49.65 CON4.30 ; CON1.50 v1(87.51,66.81) ; CON3.10 v1(35.65,61.35) ; v1(57.4,88.5) 57.74,88.84 CON2.20 ; v1(86.25,72.05) 86.01,71.81 CON1.29 ; v1(56.7,53.8) 56.7,52.23 CON4.65 ; CON2.10 v1(55.24,88.66) ; v1(70.2,53.6) 70.2,52.23 CON4.11 ; 84.78,64.31 v1(86.2,64.31) ; CON4.60 58.2,48.18 58.2,49.05 v1(57.45,49.8) ; CON4.59 58.2,52.22 v1(58.2,50.85) ; CON1.39 v1(86.19,69.31) ; CON2.50 65.24,88.74 v1(64.95,88.45) ; C4.1 v1(69.77,35.22) ; CON1.10 v1(87.56,76.81) ; v1(53.7,46.75) CON4.78 ; CON2.59 v1(67.74,87.19) ; v1(65.33,53.92) 65.7,53.55 CON4.29 ; CON2.49 65.24,87.04 v1(65.5,87.3) ; CON4.17 68.7,51.38 69.38,50.7 v1(69.4,50.7) ; 88.83,64.31 v1(87.5,64.31) ; CON4.36 64.2,48.18 v1(64.2,49.65) ; C5.1 v1(69.77,40.33) ; C2.1 v1(60.76,28.46) ; CON1.30 87.64,71.81 v1(87.5,71.95) ; CON3.59 v1(42.7,73.85) ; v1(61.2,53.65) CON4.47 ; CON3.50 v1(35.55,71.35) ; C3.1 v1(69.77,31.18) ; C1.1 v1(60.76,42.21) ; CON1.9 v1(86.24,76.81) ; CON2.70 v1(70.24,88.61) ; v1(62.7,49.7) 62.7,48.18 CON4.42 ; CON1.40 v1(87.6,69.31) ; CON4.66 56.7,46.9 57.1,46.5 v1(57.3,46.5) ; v1(55.25,46.65) 55.2,46.7 CON4.72 ; CON3.40 v1(35.55,68.85) ; CON3.29 v1(42.7,66.35) ; CON4.5 71.7,53.26 71.7,53.26 v1(71.7,53.6) ; CON3.19 v1(42.75,63.85) ; CON3.39 v1(42.65,68.85) ; CON4.71 v1(55.2,53.75) ; v1(64.2,53.6) CON4.35 ; CON2.30 v1(60.24,88.49) ; CON3.60 v1(35.6,73.85) ; CON2.9 v1(55.24,87.23) ; CON3.70 v1(35.65,76.35) ; CON3.30 v1(35.6,66.35) ; CON1.69 v1(86.09,61.81) ; CON3.69 v1(42.7,76.35) ; CON2.69 v1(70.24,87.24) ; CON3.20 v1(35.65,63.85) ; CON4.18 68.7,48.18 v1(68.7,49.7) ; CON2.40 v1(62.74,88.59) ; CON1.70 v1(87.61,61.81) ; CON3.9 v1(42.65,61.35) ; v1(53.7,50.8) CON4.77 ; CON3.49 v1(42.6,71.35) ; CON1.20 v1(87.46,74.31) ; v1(62.74,87.23) CON2.39 ; CON2.60 v1(67.74,88.59) ; CON1.49 v1(86.14,66.81)
  L2 w0.262: J3.11 109.77,33.99 ; J3.11 107.84,33.99 ; J3.11 108.81,33.02 ; J3.11 108.81,34.96 ; SMA6.4 19.82,32.84 ; SMA6.4 18.54,34.12 ; SMA6.4 17.26,32.84 ; SMA6.4 18.54,31.56 ; 71.7,30.64 72.62,30.64 ; 71.7,30.64 70.79,30.64 ; 71.7,30.64 71.7,31.56 ; 71.7,30.64 71.7,29.73 ; J2.5 90.91,96.84 ; J2.5 89.97,97.78 ; J2.5 89.97,95.91 ; J4.5 56.71,17.66 ; J4.5 55.68,18.69 ; J4.5 55.68,16.63 ; J4.5 54.65,17.66 ; 40.24,36.28 SMA8.5 ; SMA8.5 38.96,37.56 ; SMA8.5 40.24,38.84 ; SMA8.5 41.52,37.56 ; J2.1 89.97,101.78 ; J2.1 90.91,100.84 ; J2.1 89.97,99.91 ; 95.01,51.66 SMA3.3 ; SMA3.3 95.01,54.22 ; SMA3.3 93.73,52.94 ; SMA3.3 96.29,52.94 ; J2.11 90.91,90.84 ; J2.11 89.97,91.78 ; J2.11 89.97,89.91 ; SMA10.4 105.57,100.04 ; SMA10.4 103.01,100.04 ; SMA10.4 104.29,101.32 ; SMA10.4 104.29,98.76 ; 97.98,84.81 SMA9.2 ; SMA9.2 100.54,84.81 ; SMA9.2 99.26,83.53 ; SMA9.2 99.26,86.09 ; SMA7.5 40.29,29.04 ; SMA7.5 39.01,27.76 ; SMA7.5 41.57,27.76 ; SMA7.5 40.29,26.48 ; 7.66,60.86 J8.12 ; J8.12 8.6,61.8 ; J8.12 7.66,62.74 ; J8.12 6.72,61.8 ; 32.05,98.4 J9.13 ; J9.13 32.99,99.34 ; J9.13 33.93,98.4 ; J9.13 32.99,97.46 ; 6.72,74.5 J8.2 ; J8.2 7.66,73.56 ; J8.2 8.6,74.5 ; J8.2 7.66,75.44 ; SMA9.3 100.54,89.89 ; SMA9.3 97.98,89.89 ; SMA9.3 99.26,91.17 ; SMA9.3 99.26,88.61 ; J7.2 23.95,74.45 ; J7.2 23.01,75.39 ; J7.2 23.01,73.51 ; J7.2 22.07,74.45 ; 7.66,63.4 J8.10 ; J8.10 7.66,65.28 ; J8.10 6.72,64.34 ; J8.10 8.6,64.34 ; 22.07,66.83 J7.8 ; J7.8 23.95,66.83 ; J7.8 23.01,65.89 ; J7.8 23.01,67.77 ; J9.5 23.77,98.4 ; J9.5 22.83,97.46 ; J9.5 21.89,98.4 ; J9.5 22.83,99.34 ; 49.32,32.9 SMA2.4 ; SMA2.4 51.88,32.9 ; SMA2.4 50.6,31.62 ; SMA2.4 50.6,34.18 ; 6.72,66.88 J8.8 ; J8.8 7.66,65.94 ; J8.8 8.6,66.88 ; J8.8 7.66,67.82 ; J8.14 8.6,59.26 ; J8.14 7.66,58.32 ; J8.14 6.72,59.26 ; J8.14 7.66,60.2 ; 108.41,47.81 SMA4.5 ; SMA4.5 110.97,47.81 ; SMA4.5 109.69,49.09 ; SMA4.5 109.69,46.53 ; SMA5.3 24.31,34.12 ; SMA5.3 25.59,32.84 ; SMA5.3 23.03,32.84 ; SMA5.3 24.31,31.56 ; J3.20 88.81,37.86 ; J3.20 87.84,36.89 ; J3.20 89.77,36.89 ; J3.20 88.81,35.92 ; 86,27.4 J3.14 ; J3.14 86.92,28.32 ; J3.14 86,29.24 ; J3.14 85.09,28.32 ; 5,104.1 LK3.1 ; LK3.1 5,108.9 ; LK3.1 7.4,106.5 ; LK3.1 2.6,106.5 ; 104.61,46.53 SMA4.2 ; SMA4.2 103.33,47.81 ; SMA4.2 105.89,47.81 ; SMA4.2 104.61,49.09 ; 2.6,5 LK2.1 ; LK2.1 7.4,5 ; LK2.1 5,7.4 ; LK2.1 5,2.6 ; 50.99,41.41 SMA1.4 ; SMA1.4 49.71,42.69 ; SMA1.4 50.99,43.97 ; SMA1.4 52.27,42.69 ; SMA4.3 105.89,52.89 ; SMA4.3 104.61,51.61 ; SMA4.3 103.33,52.89 ; SMA4.3 104.61,54.17 ; SMA3.4 101.37,52.94 ; SMA3.4 98.81,52.94 ; SMA3.4 100.09,54.22 ; SMA3.4 100.09,51.66 ; 108,104.1 LK4.1 ; LK4.1 110.4,106.5 ; LK4.1 108,108.9 ; LK4.1 105.6,106.5 ; 22.83,94.92 J9.6 ; J9.6 22.83,96.8 ; J9.6 21.89,95.86 ; J9.6 23.77,95.86 ; 97.93,94.96 SMA10.2 ; SMA10.2 99.21,93.68 ; SMA10.2 100.49,94.96 ; SMA10.2 99.21,96.24 ; 49.32,27.82 SMA2.5 ; SMA2.5 50.6,29.1 ; SMA2.5 50.6,26.54 ; SMA2.5 51.88,27.82 ; 108,2.6 LK1.1 ; LK1.1 110.4,5 ; LK1.1 105.6,5 ; LK1.1 108,7.4 ; SMA7.4 41.57,32.84 ; SMA7.4 40.29,34.12 ; SMA7.4 39.01,32.84 ; SMA7.4 40.29,31.56 ; SMA6.3 14.74,32.84 ; SMA6.3 12.18,32.84 ; SMA6.3 13.46,31.56 ; SMA6.3 13.46,34.12 ; J3.5 78.81,43.49 ; J3.5 79.72,42.57 ; J3.5 78.81,41.65 ; J3.5 77.89,42.57 ; 45.91,36.33 SMA1.2 ; SMA1.2 47.19,37.61 ; SMA1.2 45.91,38.89 ; SMA1.2 44.63,37.61 ; J4.7 49.09,17.66 ; J4.7 47.03,17.66 ; J4.7 48.06,16.63 ; J4.7 48.06,18.69 ; 27.91,97.46 J9.9 ; J9.9 27.91,99.34 ; J9.9 26.97,98.4 ; J9.9 28.85,98.4 ; J4.2 67.11,18.69 ; J4.2 67.11,16.63 ; J4.2 68.14,17.66 ; J4.2 66.08,17.66 ; 98.81,47.86 SMA3.5 ; SMA3.5 100.09,49.14 ; SMA3.5 100.09,46.58 ; SMA3.5 101.37,47.86 ; 104.34,83.53 SMA9.5 ; SMA9.5 104.34,86.09 ; SMA9.5 105.62,84.81 ; SMA9.5 103.06,84.81 ; J9.10 27.91,96.8 ; J9.10 27.91,94.92 ; J9.10 26.97,95.86 ; J9.10 28.85,95.86 ; 24.31,26.48 SMA5.2 ; SMA5.2 24.31,29.04 ; SMA5.2 23.03,27.76 ; SMA5.2 25.59,27.76 ; J7.16 23.95,56.67 ; J7.16 23.01,57.61 ; J7.16 23.01,55.73 ; J7.16 22.07,56.67 ; 23.01,60.81 J7.12 ; J7.12 22.07,61.75 ; J7.12 23.01,62.69 ; J7.12 23.95,61.75 ; 35.16,36.28 SMA8.2 ; SMA8.2 36.44,37.56 ; SMA8.2 33.88,37.56 ; SMA8.2 35.16,38.84 ; 89.97,91.91 J2.9 ; J2.9 89.97,93.78 ; J2.9 90.91,92.84 ; SMA8.4 41.52,42.64 ; SMA8.4 40.24,43.92 ; SMA8.4 38.96,42.64 ; SMA8.4 40.24,41.36 ; SMA8.3 35.16,43.92 ; SMA8.3 36.44,42.64 ; SMA8.3 33.88,42.64 ; SMA8.3 35.16,41.36 ; 88.81,30.52 J3.19 ; J3.19 89.77,31.49 ; J3.19 88.81,32.46 ; J3.19 87.84,31.49 ; J3.10 109.77,42.57 ; J3.10 108.81,43.54 ; J3.10 107.84,42.57 ; J3.10 108.81,41.6 ; SMA10.3 99.21,101.32 ; SMA10.3 99.21,98.76 ; SMA10.3 100.49,100.04 ; SMA10.3 97.93,100.04 ; 69.89,17.66 J4.1 ; J4.1 71.95,17.66 ; J4.1 70.92,18.69 ; J4.1 70.92,16.63 ; SMA3.2 96.29,47.86 ; SMA3.2 95.01,49.14 ; SMA3.2 93.73,47.86 ; SMA3.2 95.01,46.58 ; SMA9.4 104.34,91.17 ; SMA9.4 105.62,89.89 ; SMA9.4 104.34,88.61 ; SMA9.4 103.06,89.89 ; J7.14 23.95,59.21 ; J7.14 22.07,59.21 ; J7.14 23.01,58.27 ; J7.14 23.01,60.15 ; 109.69,51.61 SMA4.4 ; SMA4.4 108.41,52.89 ; SMA4.4 110.97,52.89 ; SMA4.4 109.69,54.17 ; 71.7,34.53 J3.2 ; J3.2 70.79,35.45 ; J3.2 71.7,36.36 ; J3.2 72.62,35.45 ; 28.11,27.76 SMA5.5 ; SMA5.5 29.39,26.48 ; SMA5.5 30.67,27.76 ; SMA5.5 29.39,29.04 ; SMA6.5 19.82,27.76 ; SMA6.5 18.54,29.04 ; SMA6.5 17.26,27.76 ; SMA6.5 18.54,26.48 ; J3.13 93.81,29.29 ; J3.13 93.81,27.35 ; J3.13 94.77,28.32 ; J3.13 92.84,28.32 ; 32.99,94.92 J9.14 ; J9.14 32.99,96.8 ; J9.14 33.93,95.86 ; J9.14 32.05,95.86 ; J3.9 98.81,43.54 ; J3.9 99.77,42.57 ; J3.9 98.81,41.6 ; J3.9 97.84,42.57 ; 103.81,27.35 J3.12 ; J3.12 102.84,28.32 ; J3.12 104.77,28.32 ; J3.12 103.81,29.29 ; J7.4 23.01,72.85 ; J7.4 23.01,70.97 ; J7.4 23.95,71.91 ; J7.4 22.07,71.91 ; SMA1.5 52.27,37.61 ; SMA1.5 49.71,37.61 ; SMA1.5 50.99,38.89 ; SMA1.5 50.99,36.33 ; 6.72,71.96 J8.4 ; J8.4 8.6,71.96 ; J8.4 7.66,72.9 ; J8.4 7.66,71.02 ; J3.16 82.22,28.32 ; J3.16 80.39,28.32 ; J3.16 81.31,27.4 ; J3.16 81.31,29.24 ; SMA2.2 45.52,29.1 ; SMA2.2 45.52,26.54 ; SMA2.2 44.24,27.82 ; SMA2.2 46.8,27.82 ; 89.97,97.91 J2.3 ; J2.3 90.91,98.84 ; J2.3 89.97,99.78 ; 83.81,27.35 J3.15 ; J3.15 82.84,28.32 ; J3.15 83.81,29.29 ; J3.15 84.77,28.32 ; 80.39,42.57 J3.6 ; J3.6 81.31,43.49 ; J3.6 82.22,42.57 ; J3.6 81.31,41.65 ; J3.7 86,43.49 ; J3.7 85.09,42.57 ; J3.7 86.92,42.57 ; J3.7 86,41.65 ; J7.6 23.95,69.37 ; J7.6 22.07,69.37 ; J7.6 23.01,68.43 ; J7.6 23.01,70.31 ; 44.24,32.9 SMA2.3 ; SMA2.3 45.52,34.18 ; SMA2.3 46.8,32.9 ; SMA2.3 45.52,31.62 ; J2.13 90.91,88.84 ; J2.13 89.97,87.91 ; J2.13 89.97,89.78 ; 76.31,41.65 J3.4 ; J3.4 77.22,42.57 ; J3.4 75.39,42.57 ; J3.4 76.31,43.49 ; 89.97,93.91 J2.7 ; J2.7 89.97,95.78 ; J2.7 90.91,94.84 ; 28.11,32.84 SMA5.4 ; SMA5.4 29.39,31.56 ; SMA5.4 30.67,32.84 ; SMA5.4 29.39,34.12 ; 16.81,95.86 J9.2 ; J9.2 17.75,94.92 ; J9.2 18.69,95.86 ; J9.2 17.75,96.8 ; J3.17 76.31,29.24 ; J3.17 77.22,28.32 ; J3.17 75.39,28.32 ; J3.17 76.31,27.4 ; 104.29,93.68 SMA10.5 ; SMA10.5 103.01,94.96 ; SMA10.5 104.29,96.24 ; SMA10.5 105.57,94.96 ; 87.84,42.57 J3.8 ; J3.8 88.81,43.54 ; J3.8 88.81,41.6 ; J3.8 89.77,42.57 ; 70.79,40.24 71.7,40.24 ; 71.7,40.24 71.7,41.16 ; 71.7,40.24 71.7,39.33 ; 71.7,40.24 72.62,40.24 ; 45.91,41.41 SMA1.3 ; SMA1.3 44.63,42.69 ; SMA1.3 45.91,43.97 ; SMA1.3 47.19,42.69 ; 23.01,63.35 J7.10 ; J7.10 23.95,64.29 ; J7.10 23.01,65.23 ; J7.10 22.07,64.29 ; 35.21,31.56 SMA7.3 ; SMA7.3 36.49,32.84 ; SMA7.3 33.93,32.84 ; SMA7.3 35.21,34.12 ; 73.81,27.35 J3.18 ; J3.18 74.77,28.32 ; J3.18 73.81,29.29 ; J3.18 72.84,28.32 ; SMA6.2 14.74,27.76 ; SMA6.2 12.18,27.76 ; SMA6.2 13.46,29.04 ; SMA6.2 13.46,26.48 ; SMA7.2 36.49,27.76 ; SMA7.2 35.21,29.04 ; SMA7.2 35.21,26.48 ; SMA7.2 33.93,27.76
  BOTTOM w0.262: v1(29.4,19.1) C8.2 v1(32.3,17.2) ; J5.MP4 v1(104.04,62.3) ; v1(21.39,19.44) C10.2 v1(18.46,17.31) ; J6.A14 v1(67.26,102.95) 67.15,102.95 66.76,102.56 J6.B14 ; J1.10 81.25,31.64 v1(80.6,30.98) ; J6.MP4 v1(73.87,102.22) ; J5.A20 v1(104.85,65.94) ; J5.MP1 v1(108.76,79.09) ; v1(70.5,100.6) 70.3,100.8 70.13,100.8 69.76,101.17 J6.B20 69.76,102.46 v1(70.25,102.95) 70.25,104.01 J6.A20 ; J6.A17 v1(68.76,102.98) 68.26,102.48 J6.B17 68.26,100.98 68.25,100.97 v1(68.25,100.4) ; v1(102.4,66.15) 102.65,66.15 102.94,66.44 J5.B20 ; v1(75.65,33.8) 75.65,33.95 75.29,34.31 74.97,34.31 74.85,34.44 J1.14 ; J1.1 80.86,38.84 80.85,38.85 v1(80.42,38.85) ; v1(102.6,75.65) 102.81,75.44 J5.B2 ; J5.A14 v1(104.85,68.94) 104.35,69.44 J5.B14 ; v1(38.5,9.35) C7.2 v1(35.55,11.35) ; J6.A11 65.76,103.44 65.27,102.95 v1(65.26,102.95) 65.26,101.83 J6.B11 65.26,100.44 v1(65.3,100.4) ; v1(102.05,71.05) 102.16,70.94 J5.B11 104.37,70.94 104.87,70.44 J5.A11 ; J5.A17 v1(104.91,67.44) 104.41,67.94 J5.B17 ; SW1.4 v1(62.92,65.78) ; J5.MP3 v1(104.04,79.1) ; v1(60.55,100.75) 60.76,100.96 J6.B2 60.76,102.66 v1(61,102.9) 61.26,103.16 J6.A2 ; J1.9 v1(80.42,32.44) ; J6.MP2 v1(73.9,106.94) ; J6.B8 63.76,102.41 64.15,102.8 v1(64.15,102.9) 64.26,103.01 J6.A8 ; v1(75.55,37.45) 75.55,37.25 75.34,37.04 75.17,37.04 74.97,36.84 J1.17 ; C12.1 v1(90,82.95) ; C11.1 84.6,79.85 v1(84.35,79.85) ; J6.MP1 v1(57.14,106.94) ; v1(74.35,70.05) 74.3,70.1 C9.1 ; J5.A5 104.96,73.44 v1(104.75,73.65) 104.46,73.94 J5.B5 ; v1(104.75,75.4) 104.75,75.33 105.13,74.94 J5.A2 ; J6.A5 62.76,103.38 62.25,102.87 v1(62.1,102.87) 62.1,102.85 62.26,102.69 J6.B5 ; J5.MP2 v1(108.76,62.3) ; J5.B8 104.65,72.44 v1(104.75,72.55) 104.75,72.46 105.27,71.94 J5.A8 ; SW1.3 v1(62.88,59.02) ; IC1.3 73.86,72.51 v1(74.42,71.95) ; J1.11 v1(75.39,32.03) ; J1.20 v1(75.39,39.23) ; J6.MP3 v1(57.27,102.22)
  vias: v1(3.95,75.9) v1(31.7,86.4) v1(46.15,83.95) v1(47.95,49.65) v1(49.55,89.15) v1(50.2,85.85) v1(51.15,93.75) v1(52.9,93.8) v1(53.4,99.8) v1(59.4,94.7) v1(59.7,50.75) v1(60.95,81.65) v1(63.9,107.85) v1(65,107.1) v1(65.2,80.4) v1(66.1,84.3) v1(66.6,97.3) v1(68.9,46.65) v1(70.1,108.05) v1(73.25,56.3) v1(73.9,96.35) v1(74.3,53.2) v1(77.75,64.8) v1(79.3,71.3) v1(81.35,65.5) v1(94,72.15) v1(94.85,67.65) v1(95.05,78.85) v1(98.9,78.3) v1(100.05,76) v1(100.8,80.7) v1(101,64.85) v1(110.8,75.05) v1(111.55,69.2) v1(111.75,72.25)
P1V8: length 75.9
  BOTTOM w0.262: R12.2 76.15,72.18 ; R12.2 76.83,71.55 ; R12.2 76.15,70.92 ; R12.2 75.47,71.55 ; R4.2 81.59,98.94 ; R4.2 80.34,98.94 ; R4.2 80.96,99.62 ; R4.2 80.96,98.26 ; J7.5 25.55,70.31 ; J7.5 26.49,69.37 ; J7.5 24.61,69.37 ; J7.5 25.55,68.43 ; 29.4,10.01 C8.1 ; C8.1 31.17,11.2 ; C8.1 27.63,11.2 ; C8.1 29.4,12.39 ; 10.2,65.94 J8.7 ; J8.7 10.2,67.82 ; J8.7 9.26,66.88 ; J8.7 11.14,66.88 ; 24.61,71.91 J7.3 ; J7.3 26.49,71.91 ; J7.3 25.55,72.85 ; J7.3 25.55,70.97 ; R2.2 81.59,95.13 ; R2.2 80.96,94.45 ; R2.2 80.34,95.13 ; R2.2 80.96,95.81 ; 71.65,69.42 C9.2 ; C9.2 71.65,70.78 ; C9.2 71.02,70.1 ; C9.2 72.28,70.1 ; IC1.5 72.16,73.81 ; IC1.5 71.56,73.41 ; IC1.5 70.96,73.81 ; IC1.5 71.56,74.22 ; 59.49,16.63 J4.4 ; J4.4 60.52,17.66 ; J4.4 58.46,17.66 ; J4.4 59.49,18.69 ; 87.97,101.78 J2.2 87.03,100.84 ; R10.2 80.83,60.4 ; R10.2 80.2,61.08 ; R10.2 79.57,60.4 ; 24.61,74.45 J7.1 ; J7.1 26.49,74.45 ; J7.1 25.55,73.51 ; J7.1 25.55,75.39 ; J8.1 11.14,74.5 ; J8.1 10.2,75.44 ; J8.1 10.2,73.56 ; J8.1 9.26,74.5 ; 80.96,92.55 R1.2 ; R1.2 80.34,93.22 ; R1.2 81.59,93.22 ; R1.2 80.96,93.9 ; J4.3 64.33,17.66 ; J4.3 63.3,16.63 ; J4.3 62.27,17.66 ; J4.3 63.3,18.69 ; 80.34,97.03 R3.2 ; R3.2 80.96,97.71 ; R3.2 80.96,96.36 ; R3.2 81.59,97.03 ; 66.37,68.65 R11.2 ; R11.2 67,67.97 ; R11.2 67.63,68.65 ; R11.2 67,69.33 ; J7.7 25.55,67.77 ; J7.7 25.55,65.89 ; J7.7 24.61,66.83 ; J7.7 26.49,66.83 ; 9.26,71.96 J8.3 ; J8.3 11.14,71.96 ; J8.3 10.2,72.9 ; J8.3 10.2,71.02 ; J8.13 11.14,59.26 ; J8.13 10.2,60.2 ; J8.13 10.2,58.32 ; J8.13 9.26,59.26 ; J7.9 25.55,65.23 ; J7.9 26.49,64.29 ; J7.9 24.61,64.29 ; J7.9 25.55,63.35 ; J9.1 17.75,99.34 ; J9.1 16.81,98.4 ; J9.1 17.75,97.46 ; J9.1 18.69,98.4
  vias: v1(14.4,92.9) v1(40.6,80.65) v1(54.65,96.05) v1(58.65,79.25) v1(96.15,61.1)
P3V3: length 42.3
  TOP w0.262: 68.2,28.57 R13.2 ; R13.2 67.57,29.25 ; R13.2 68.83,29.25 ; R13.2 68.2,29.93 ; 51.87,16.63 J4.6 ; J4.6 52.9,17.66 ; J4.6 50.84,17.66 ; J4.6 51.87,18.69 ; L2.2 63.15,37.98 ; L2.2 62.4,37.08 ; L2.2 61.65,37.98 ; L2.2 62.4,38.88 ; C1.2 60.76,40.4 ; C1.2 60.08,39.77 ; C1.2 61.44,39.77 ; C1.2 60.76,39.14 ; 60.76,30.48 C2.2 ; C2.2 61.44,31.11 ; C2.2 60.76,31.74 ; C2.2 60.08,31.11 ; 62.4,32 L1.1 ; L1.1 63.15,32.9 ; L1.1 61.65,32.9 ; L1.1 62.4,33.8
  BOTTOM w0.262: v1(69.95,72.8) 68.55,72.8 R15.2 ; 81.85,53.97 R5.2 ; R5.2 82.48,54.65 ; R5.2 81.22,54.65 ; R5.2 81.85,55.33 ; v1(24.64,11.31) C10.1 v1(18.26,11.31) ; R8.2 87.2,52.68 ; R8.2 87.83,52 ; R8.2 86.57,52 ; R8.2 87.2,51.32 ; 81.27,49.6 R6.2 ; R6.2 82.53,49.6 ; R6.2 81.9,48.92 ; R6.2 81.9,50.28 ; R14.2 87.78,54.75 ; R14.2 87.15,54.07 ; R14.2 86.52,54.75 ; R14.2 87.15,55.43 ; 81.27,52.1 R7.2 ; R7.2 82.53,52.1 ; R7.2 81.9,51.42 ; R7.2 81.9,52.78 ; 86.52,49.5 R9.2 ; R9.2 87.15,48.82 ; R9.2 87.78,49.5 ; R9.2 87.15,50.18
  vias: v1(77,53.4) v1(77,51.65) v1(79,45.35) v1(85.5,45.4) v1(87.4,45.45) v1(88.2,54.8)
P12V: length 25.2
  TOP w0.262: J4.8 45.28,17.66 ; J4.8 43.22,17.66 ; J4.8 44.25,18.69 ; J4.8 44.25,16.63 ; CON1.3 v1(86.29,78.31) ; CON1.7 83.86,77.31 v1(83.36,77.81) CON1.5 ; CON1.4 89.85,78.31 90.29,78.75 v1(90.45,78.75) ; v1(87.35,79.1) 87.64,78.81 CON1.2 ; CON1.6 89.88,77.81 90.15,77.54 90.15,77.31 ; v1(90.42,77.58) 90.15,77.31 ; 90.15,77.31 CON1.8 ; v1(83.45,79) 83.64,78.81 CON1.1
  BOTTOM w0.262: 89.32,80.25 C12.2 ; C12.2 90.68,80.25 ; C12.2 90,79.62 ; 86.12,80.5 C11.2 86.75,79.82 ; v1(35.6,17.35) C7.1 v1(38.5,19.45)
  vias: v1(66.3,75.2) v1(66.85,76.1) v1(67.45,75.2) v1(68.02,76.07) v1(68.65,75.2) v1(69.22,76.07) v1(69.85,75.2)
VCCR_3V3: length 9.5
  TOP w0.262: 67.64,34.17 C4.2 ; C4.2 68.26,33.49 ; C4.2 68.89,34.17 ; C4.2 68.26,34.85 ; 68.26,31.59 C3.2 ; C3.2 67.64,32.27 ; C3.2 68.26,32.94 ; C3.2 68.89,32.27 ; L1.2 64.2,33.8 ; L1.2 64.95,32.9 ; L1.2 64.2,32
  BOTTOM w0.262: J1.15 75.17,35.23 75.3,35.1 v1(75.5,35.1)
VCCT_3V3: length 9.6
  TOP w0.262: L2.1 64.95,37.98 ; L2.1 64.2,38.88 ; L2.1 64.2,37.08 ; 68.26,38.57 C5.2 ; C5.2 68.26,39.93 ; C5.2 68.89,39.25 ; C5.2 67.64,39.25 ; C6.2 68.89,37.34 ; C6.2 68.26,36.67 ; C6.2 68.26,38.02 ; C6.2 67.64,37.34
  BOTTOM w0.262: v1(75.5,36.25) 75.28,36.03 J1.16
225_RX_N<0>: length 67.9
  TOP w0.262: CON4.32 65.2,46.13 65.76,45.56 72.86,45.56 73.64,46.34 73.64,47.04 77.4,50.8 88,50.8 88.99,51.78 88.99,55.88 98.69,65.59 98.69,66.55 99.4,67.26 99.71,67.26 99.76,67.31 100.28,67.31 100.63,67.66 100.77,67.66 102.82,69.72 102.82,69.79 104.01,70.98 104.08,70.98 104.86,71.76 105.08,71.76 105.54,72.22 105.54,72.44 108.13,75.02 109.33,75.02 109.45,75.14 109.51,75.14 109.66,75.28 109.66,75.69 109.72,75.75 v1(109.77,75.75)
  BOTTOM w0.262: v1(109.77,75.75) 109.77,75.21 109.7,75.14 109.45,75.14 109.43,75.12 107.91,75.12 107.23,74.44 J5.A3
225_RX_N<1>: length 75.4
  TOP w0.262: CON4.38 63.7,46.92 63.66,46.88 63.66,46.19 65.4,44.45 73.25,44.45 78.2,49.4 88.75,49.4 90.18,50.82 90.18,55.67 93.22,58.71 96.43,58.71 96.44,58.72 105.08,58.72 107.48,61.12 107.48,66.57 108.65,67.75 108.65,69.42 109.34,70.12 109.34,70.46 109.38,70.5 109.38,70.72 109.76,71.11 109.76,71.68 110.75,72.66 v1(110.75,72.95)
  BOTTOM w0.262: v1(110.75,72.95) 109.95,72.95 109.86,73.04 109.86,73.15 109.05,73.96 108.15,73.96 107.48,73.29 107.14,73.29 106.7,72.85 106.52,72.85 106.42,72.94 J5.A6
225_RX_N<2>: length 77.9
  TOP w0.262: v1(110.55,69.96) 110.55,69.68 109.76,68.89 109.76,68.23 110.13,67.87 110.13,67.43 109.43,66.73 109.43,63 109.55,62.88 109.55,61.69 109.43,61.56 109.43,60.27 106.43,57.27 93.73,57.27 91.28,54.82 91.28,49.97 89.45,48.15 78.35,48.15 73.4,43.2 64.95,43.2 62.16,45.99 62.16,46.88 62.2,46.92 CON4.44
  BOTTOM w0.262: v1(110.55,69.96) 110.06,69.47 110.06,69.21 109.92,69.07 109.92,69.05 109.76,68.89 109.76,67.92 109.42,67.57 107.39,67.57 106.61,68.35 106.52,68.35 106.44,68.43 106.01,68.43 105.99,68.44 J5.A15
225_RX_N<3>: length 78
  TOP w0.262: v1(110.89,66.19) 110.89,65.57 110.87,65.55 110.74,65.55 110.28,65.09 110.28,64.44 111.08,63.64 111.08,58.92 108.03,55.87 94.08,55.87 92.98,54.77 92.98,49.67 90.3,47 78.62,47 73.7,42.07 63.93,42.07 60.66,45.34 60.66,46.88 60.7,46.92 CON4.50
  BOTTOM w0.262: J5.A18 106.28,66.94 106.29,66.93 106.44,66.93 106.52,66.85 106.61,66.85 107.23,66.24 110.19,66.24 110.38,66.05 110.75,66.05 v1(110.89,66.19)
225_RX_P<0>: length 67.9
  TOP w0.262: CON4.34 64.7,47.07 64.78,47 64.78,45.95 65.59,45.14 73.04,45.14 74.06,46.16 74.06,46.86 77.57,50.38 88.18,50.38 89.41,51.61 89.41,55.71 99.11,65.41 99.11,66.38 99.57,66.84 99.88,66.84 99.93,66.89 100.46,66.89 100.81,67.24 100.94,67.24 103.24,69.54 103.24,69.61 104.19,70.56 104.26,70.56 105.04,71.34 105.25,71.34 105.96,72.05 105.96,72.26 108.3,74.6 109.48,74.6 109.61,74.48 109.65,74.48 v1(109.77,74.35)
  BOTTOM w0.262: J5.A4 106.78,73.94 106.86,74.02 107.4,74.02 108.08,74.7 109.51,74.7 109.77,74.44 v1(109.77,74.35)
225_RX_P<1>: length 75.7
  TOP w0.262: CON4.40 63.2,46.92 63.24,46.88 63.24,46.02 65.23,44.03 73.42,44.03 78.37,48.98 88.93,48.98 90.6,50.65 90.6,55.5 93.39,58.29 96.6,58.29 96.61,58.3 105.25,58.3 107.9,60.95 107.9,66.4 109.07,67.57 109.07,69.25 109.76,69.94 109.76,70.29 109.8,70.33 109.8,70.55 110.19,70.94 110.19,71.17 110.56,71.55 v1(110.75,71.55)
  BOTTOM w0.262: v1(110.75,71.55) 109.77,72.53 109.77,72.53 109.44,72.87 109.44,72.97 108.87,73.54 108.32,73.54 107.65,72.87 107.31,72.87 106.87,72.43 106.34,72.43 106.33,72.44 J5.A7
225_RX_P<2>: length 76.7
  TOP w0.262: CON4.46 61.7,46.92 61.74,46.88 61.74,45.82 64.78,42.78 73.57,42.78 78.52,47.73 89.63,47.73 91.7,49.8 91.7,54.65 93.9,56.85 106.6,56.85 109.85,60.1 109.85,61.39 109.98,61.51 109.98,63.05 109.85,63.18 109.85,66.55 110.55,67.25 v1(110.55,68.56)
  BOTTOM w0.262: J5.A16 106.33,67.94 106.34,67.93 106.44,67.93 107.22,67.15 109.59,67.15 110.18,67.74 110.18,68.49 110.34,68.64 110.47,68.64 v1(110.55,68.56)
225_RX_P<3>: length 77.9
  TOP w0.262: CON4.52 60.2,46.92 60.24,46.88 60.24,45.17 63.75,41.65 73.87,41.65 78.8,46.58 90.48,46.58 93.4,49.5 93.4,54.6 94.25,55.45 108.2,55.45 111.5,58.75 111.5,64.33 v1(111.07,64.77)
  BOTTOM w0.262: v1(111.07,64.77) 110.01,65.82 107.05,65.82 106.44,66.43 106.19,66.43 106.18,66.44 J5.A19
ADC_CALSTAT: length 69.2
  TOP w0.262: CON1.15 81.65,75.31 81.11,75.85 80.2,75.85 v1(78.85,77.2)
  BOTTOM w0.262: v1(78.85,77.2) 78.2,77.85 69.56,77.85 69.53,77.89 68.87,77.89 68.84,77.85 68.31,77.85 68.28,77.89 67.62,77.89 67.59,77.85 67.16,77.85 67.13,77.89 66.47,77.89 66.44,77.85 65.85,77.85 44.67,56.67 J7.15
ADC_CALTRIG: length 68.4
  TOP w0.262: v1(79.65,78.4) 81.75,76.3 82.67,76.3 83.17,75.81 CON1.13
  BOTTOM w0.262: J7.13 46.01,59.21 65.4,78.6 78.73,78.6 78.93,78.4 v1(79.65,78.4)
ADC_ORC_N: length 27.4
  TOP w0.262: v1(108.65,71.35) 107.95,71.35 107.66,71.06 106.08,71 105.59,70.52 105.38,70.52 104.6,69.73 104.53,69.73 104.07,69.27 104.07,69.2 101.66,66.8 101.66,66.53 101.61,66.48 101.61,66.36 v1(101.3,66.05) ; CON1.46 89.86,67.81 91.22,66.45 95.32,66.45 v1(97,68.13)
  BOTTOM w0.262: v1(97,68.13) 97.63,67.5 99.55,67.5 100.16,66.89 100.59,66.89 101.3,66.17 v1(101.3,66.05) ; J5.A10 106.78,70.94 106.82,70.98 108.28,70.98 v1(108.65,71.35)
ADC_ORC_P: length 27.5
  TOP w0.262: v1(97,66.73) 96.2,66.73 95.49,66.03 91.04,66.03 89.83,67.24 89.71,67.24 89.65,67.31 CON1.48 ; v1(108.6,72.7) 107.47,71.48 105.9,71.42 105.42,70.94 105.21,70.94 104.42,70.16 104.35,70.16 103.64,69.45 103.64,69.38 101.11,66.84 100.97,66.84 100.19,66.05 v1(99.9,66.05)
  BOTTOM w0.262: v1(97,66.73) 97.35,67.08 99.28,67.08 99.9,66.46 v1(99.9,66.05) ; J5.A9 107,71.44 108.26,72.7 v1(108.6,72.7)
ADC_ORD_N: length 33.9
  TOP w0.262: v1(82.25,66.95) 82.66,67.36 82.66,67.51 82.91,67.76 84.73,67.76 CON1.45 ; v1(99.44,71.55) 99.93,71.06 99.93,70.69 99.67,70.43 96.73,70.43 96.47,70.69 96.47,71.06 96.17,71.36 96.17,71.89 v1(96.66,72.38)
  BOTTOM w0.262: v1(96.66,72.38) 96.17,71.89 96.17,71.34 95.36,70.53 93.99,70.53 93.58,70.94 92.59,70.94 92.1,70.45 83.95,70.45 81.8,68.3 81.8,67.4 v1(82.25,66.95) ; v1(99.44,71.55) 99.93,71.06 99.93,70.62 100.44,70.11 100.99,70.11 101.48,69.63 102.5,69.63 102.83,69.96 103.06,69.96 103.06,69.96 103.21,69.96 103.22,69.94 J5.B13
ADC_ORD_P: length 36.8
  TOP w0.262: CON1.47 83.35,67.31 83.09,67.04 83.09,66.67 82.58,66.16 81.92,66.16 81.46,66.62 81.46,66.84 81.25,67.05 80.95,67.05 v1(80.85,66.95) ; v1(95.26,72.38) 95.75,71.89 95.75,71.19 96.05,70.89 96.05,70.52 96.56,70.01 99.84,70.01 100.35,70.52 100.35,71.06 v1(100.84,71.55)
  BOTTOM w0.262: J5.B12 102.72,70.44 102.32,70.05 101.65,70.05 101.16,70.54 100.61,70.54 100.35,70.8 100.35,71.06 v1(100.84,71.55) ; v1(95.26,72.38) 95.75,71.89 95.75,71.52 95.18,70.95 94.16,70.95 93.75,71.36 92.41,71.36 91.93,70.87 83.78,70.87 81.38,68.47 81.38,67.48 v1(80.85,66.95)
ADC_REFCLK_N: length 56.9
  TOP w0.262: v1(74.18,54.75) 73.53,54.75 73.11,54.33 72.46,54.33 71.83,54.95 71.51,54.95 71.29,55.17 70.64,55.17 70.41,54.95 67.31,54.95 66.66,54.3 66.66,52.26 CON4.25 ; v1(107.8,68.5) 107.31,68.99 106.94,68.99 106.35,68.4 106.35,61.35 104.53,59.53 100.85,59.53 100.82,59.5 v1(96.1,59.5)
  BOTTOM w0.262: J5.A13 106.66,69.44 107.6,68.5 v1(107.8,68.5) ; v1(96.1,59.5) 95.69,59.09 95.55,59.09 95.28,58.81 94.62,58.81 94.44,59 78.8,59 74.55,54.75 v1(74.18,54.75)
ADC_REFCLK_P: length 57
  TOP w0.262: v1(107.8,69.91) 107.31,69.42 106.76,69.42 105.93,68.58 105.93,61.52 104.35,59.95 96.76,59.95 96.43,60.29 95.77,60.29 95.59,60.11 95.46,60.11 v1(94.95,59.6) ; v1(72.78,55.11) 72.27,55.11 72.01,55.37 71.69,55.37 71.47,55.6 70.46,55.6 70.24,55.37 67.13,55.37 66.24,54.48 66.24,52.26 CON4.27
  BOTTOM w0.262: v1(72.78,55.11) 73.15,55.11 73.57,55.54 74.74,55.54 78.63,59.42 94.6,59.42 94.78,59.6 v1(94.95,59.6) ; v1(107.8,69.91) 106.82,69.91 106.78,69.94 J5.A12
ADC_SCLK_N: length 22.1
  TOP w0.262: v1(98.24,77.28) 98.73,76.79 98.73,76.42 97.58,75.27 90.12,75.27 90.08,75.31 CON1.16
  BOTTOM w0.262: J5.B10 103.64,71.46 103.06,71.46 102.98,71.54 102.89,71.54 102.38,72.05 101.45,72.05 101.17,72.34 99.51,72.34 97.96,73.89 97.96,75.39 98.73,76.16 98.73,76.79 v1(98.24,77.28)
ADC_SCLK_P: length 22
  TOP w0.262: CON1.18 90.08,74.81 90.12,74.84 97.75,74.84 99.15,76.24 99.15,76.79 v1(99.64,77.28)
  BOTTOM w0.262: v1(99.64,77.28) 99.15,76.79 99.15,75.98 98.38,75.22 98.38,74.06 99.69,72.76 101.34,72.76 101.63,72.47 102.55,72.47 103.06,71.96 103.28,71.96 103.29,71.94 J5.B9
ADC_SCSB_N: length 18.2
  TOP w0.262: CON1.36 90.08,70.31 90.12,70.27 92.03,70.27 93.02,69.27 93.14,69.27 93.34,69.52 93.34,69.52 v1(93.25,70.15)
  BOTTOM w0.262: v1(93.25,70.15) 93.25,69.35 93.51,69.09 93.51,69.02 93.97,68.56 94.63,68.56 94.71,68.65 95.48,68.65 95.76,68.93 98.87,68.93 100.14,67.66 100.94,67.66 101.62,66.98 102.68,66.98 102.72,66.94 J5.B19
ADC_SCSB_P: length 16.3
  TOP w0.262: v1(94.3,69.35) 93.67,69.27 93.45,68.97 93.32,68.85 92.85,68.85 91.85,69.84 90.12,69.84 90.08,69.81 CON1.38
  BOTTOM w0.262: J5.B18 102.72,67.44 102.68,67.41 101.79,67.41 101.12,68.08 100.31,68.08 99.05,69.35 v1(94.3,69.35)
ADC_SDI_N: length 22.5
  TOP w0.262: v1(95.47,77.52) 95.69,77.52 95.84,77.37 95.63,77.16 94.51,77.16 93.66,76.31 CON1.12
  BOTTOM w0.262: J5.B16 102.72,68.44 102.68,68.48 100.79,68.48 97.45,71.83 97.45,72.7 95.98,74.17 95.98,75.34 96.63,75.99 96.63,76.36 v1(95.47,77.52)
ADC_SDI_P: length 24.1
  TOP w0.262: v1(96.46,78.51) 96.26,78.31 96.26,77.2 95.8,76.74 94.69,76.74 93.83,75.88 90.16,75.88 90.08,75.81 CON1.14
  BOTTOM w0.262: v1(96.46,78.51) 96.75,78.23 96.75,76.85 97.06,76.54 97.06,75.82 96.4,75.16 96.4,74.35 97.87,72.88 97.87,72 100.97,68.91 102.68,68.91 102.72,68.94 J5.B15
ADC_SDO: length 68.4
  TOP w0.262: v1(80,79.9) 80.51,79.39 80.51,79.16 83.36,76.31 CON1.11
  BOTTOM w0.262: J7.11 26.27,62.47 47.47,62.47 64.11,79.11 71.78,79.11 71.96,79.3 78.65,79.3 79.25,79.9 v1(80,79.9)
ADC_SYSREF_N: length 45.5
  TOP w0.262: CON1.25 83.52,72.81 83.48,72.77 82.38,72.77 81.08,74.07 78.82,74.07 76.97,75.92 76.97,79.12 79,81.15 97.25,81.15 97.47,81.37 98.28,81.37 98.65,81 v1(98.65,80.3)
  BOTTOM w0.262: v1(98.65,80.3) 99.35,80.3 101.48,78.17 101.48,76.24 101.39,76.15 101.39,75.15 101.48,75.06 101.48,74.48 102.05,74.48 102.1,74.44 103.1,74.44 103.11,74.44 J5.B4
ADC_SYSREF_P: length 46.7
  TOP w0.262: CON1.27 83.52,72.31 83.48,72.34 82.21,72.34 80.9,73.65 78.65,73.65 76.55,75.75 76.55,79.3 78.83,81.57 97.08,81.57 97.29,81.79 98.46,81.79 98.95,81.29 v1(99.64,81.29)
  BOTTOM w0.262: v1(99.64,81.29) 99.64,80.6 101.9,78.35 101.9,76.06 101.81,75.98 101.81,75.32 101.9,75.24 101.9,74.91 102.23,74.91 102.27,74.86 102.93,74.86 103.01,74.94 J5.B3
ADC_TRIGOUT_N: length 17.4
  TOP w0.262: CON1.22 90.08,73.81 90.12,73.77 99.4,73.77 99.66,74.03 99.66,74.4 v1(99.17,74.89)
  BOTTOM w0.262: v1(99.17,74.89) 99.78,74.28 99.78,74.1 100.72,73.16 101.51,73.16 101.69,72.98 102.68,72.98 102.72,72.94 J5.B7
ADC_TRIGOUT_P: length 17
  TOP w0.262: v1(100.57,74.89) 100.08,74.4 100.08,73.85 99.57,73.34 90.12,73.34 90.08,73.31 CON1.24
  BOTTOM w0.262: J5.B6 102.72,73.44 102.68,73.41 101.86,73.41 101.68,73.58 100.9,73.58 100.57,73.91 v1(100.57,74.89)
ETH_REFCLK_N: length 31.4
  TOP w0.262: CON4.26 66.7,47.11 67.3,46.5 v1(67.65,46.5)
  BOTTOM w0.262: SMA2.1 48.06,32.38 50.78,35.1 52.85,35.1 55.75,38 55.75,40.35 59.05,43.65 65.35,43.65 67.14,45.43 67.14,45.98 v1(67.65,46.5)
ETH_REFCLK_P: length 29.8
  TOP w0.262: CON4.28 v1(66.2,46.49)
  BOTTOM w0.262: v1(66.2,46.49) 66.72,45.98 66.72,45.61 65.18,44.07 58.87,44.07 55.33,40.53 55.33,38.18 52.67,35.52 50.85,35.52 48.45,37.92 SMA1.1
ETH_RX_N: length 24.9
  TOP w0.262: CON4.2 72.7,46.92 72.68,46.9 72.68,46.68 v1(72.35,46.35)
  BOTTOM w0.262: v1(72.35,46.35) 71.59,47.11 71.2,47.11 71.13,47.19 70.47,47.19 70.01,46.73 70.01,46.26 67.15,43.4 67.15,35.65 69.75,33.05 72.45,33.05 72.67,32.84 J1.12
ETH_RX_P: length 21.9
  TOP w0.262: CON4.4 72.2,47.31 71.29,46.4 v1(70.8,46.4)
  BOTTOM w0.262: J1.13 72.6,33.64 72.43,33.47 69.93,33.47 67.57,35.83 67.57,43.23 70.31,45.96 70.36,45.96 v1(70.8,46.4)
